# Allegro board pc049a_toplevel_12.brd
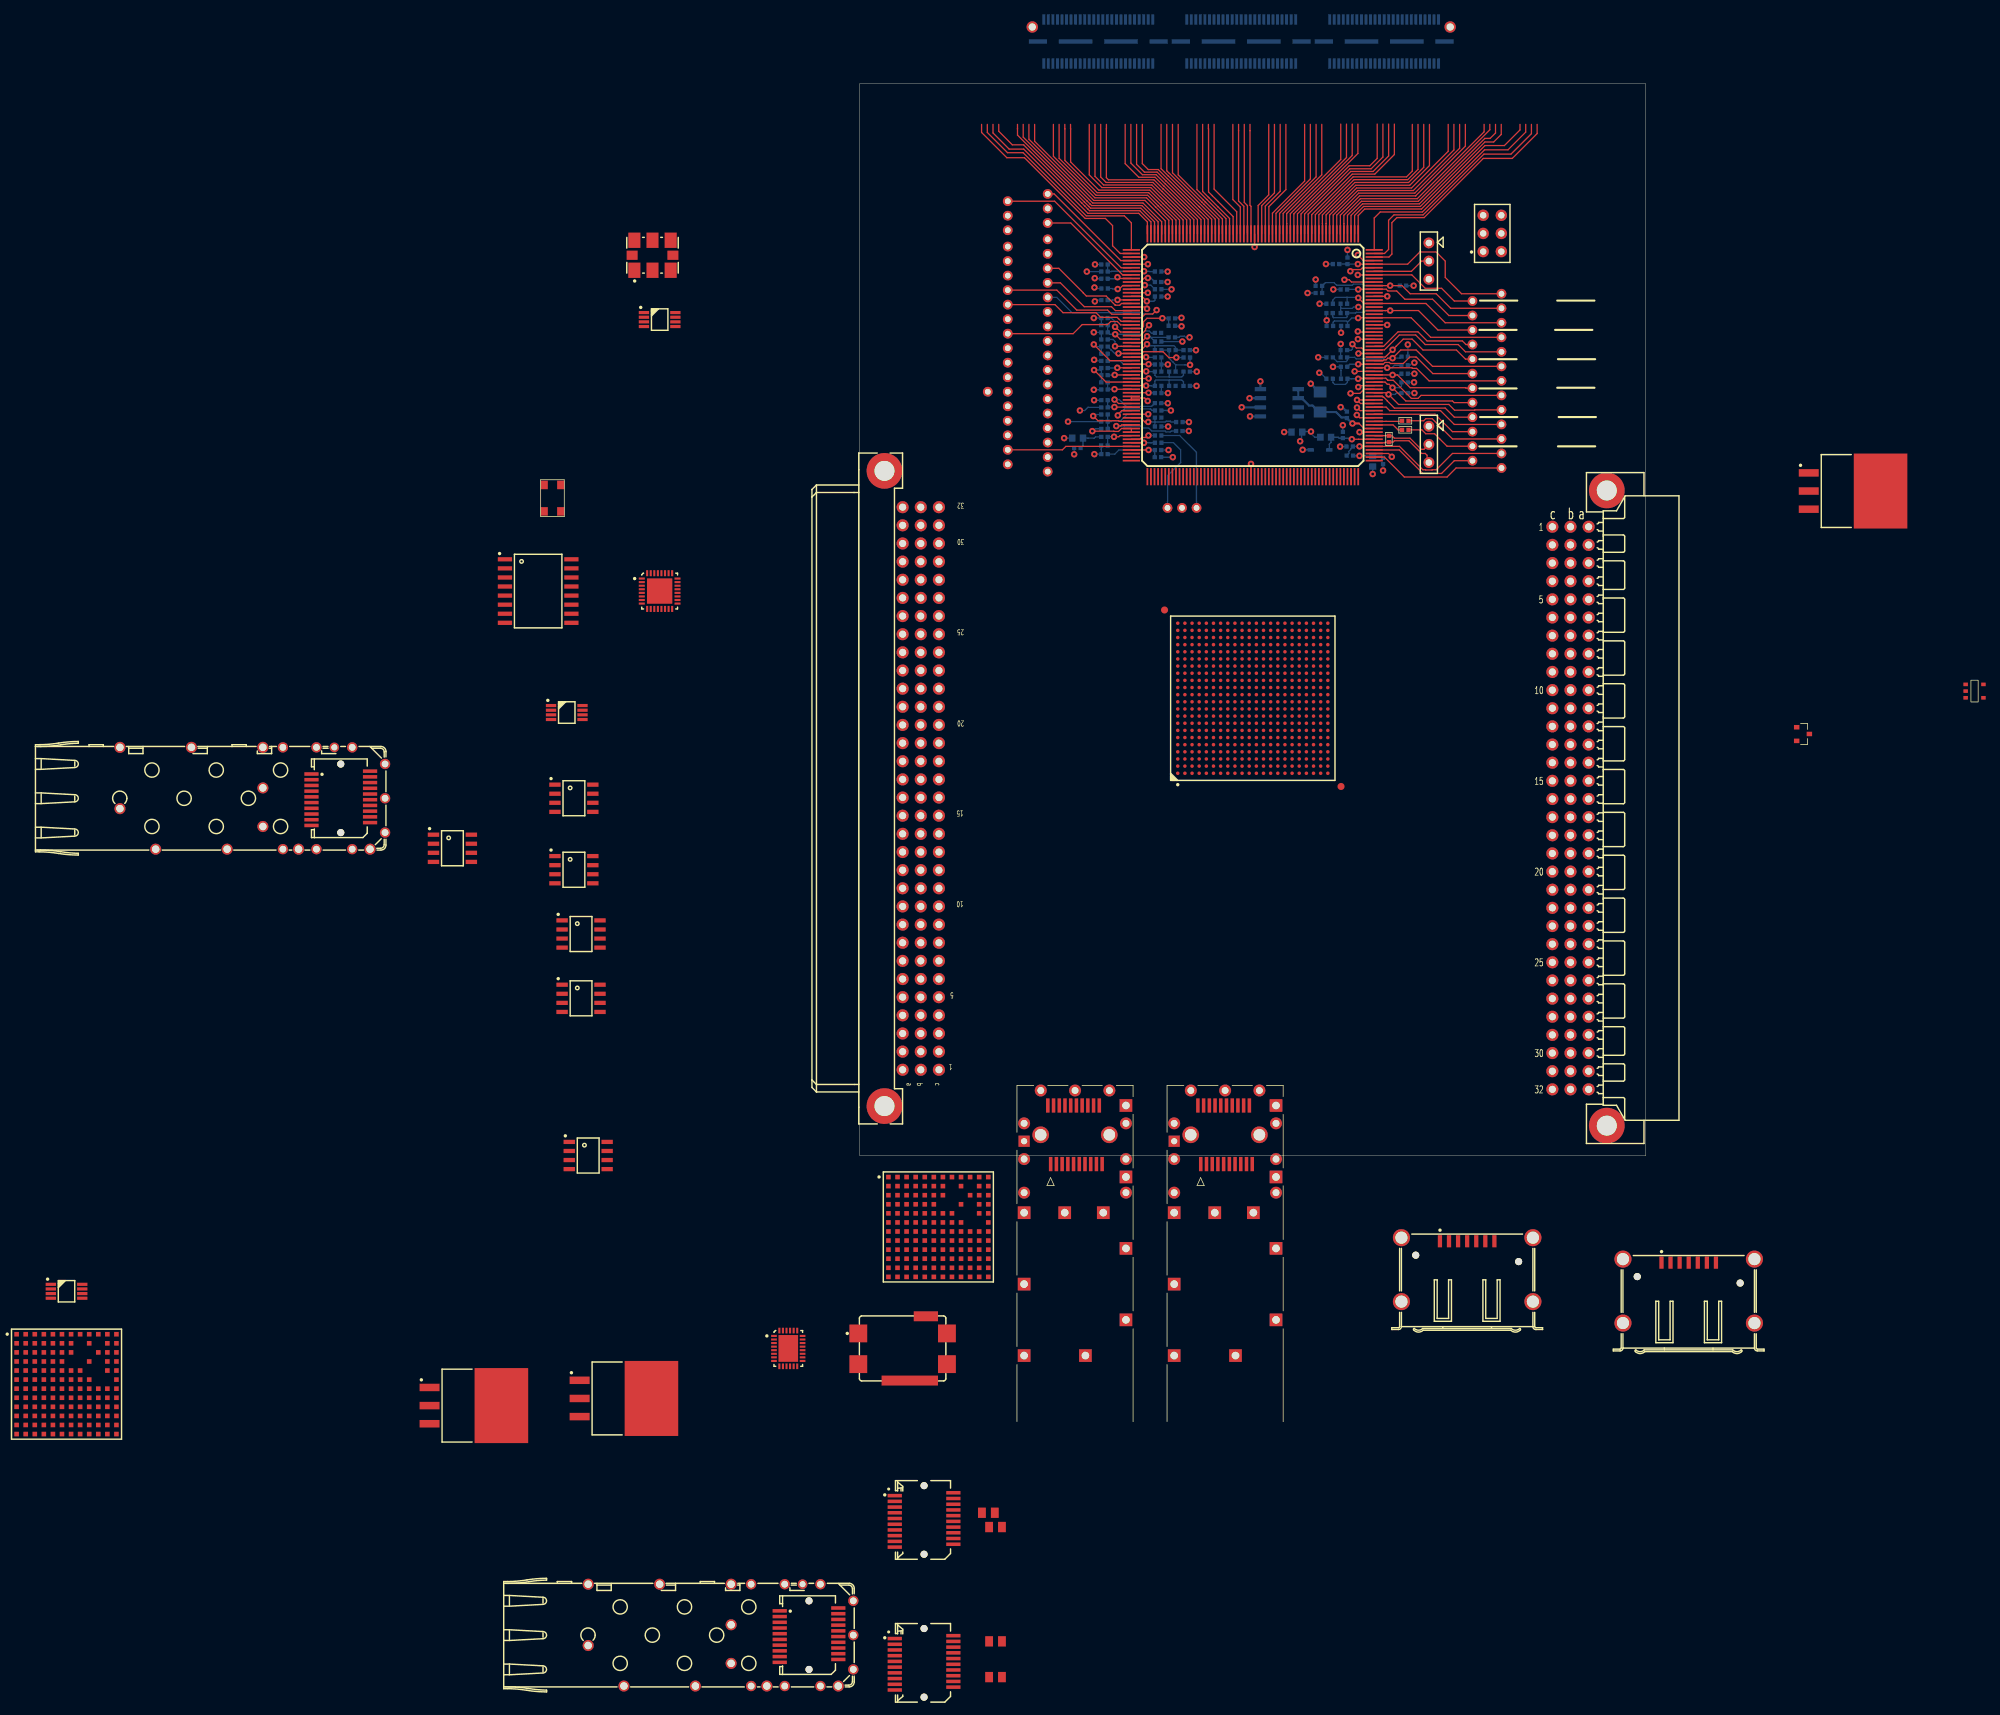
[diagram p0: board, top side]
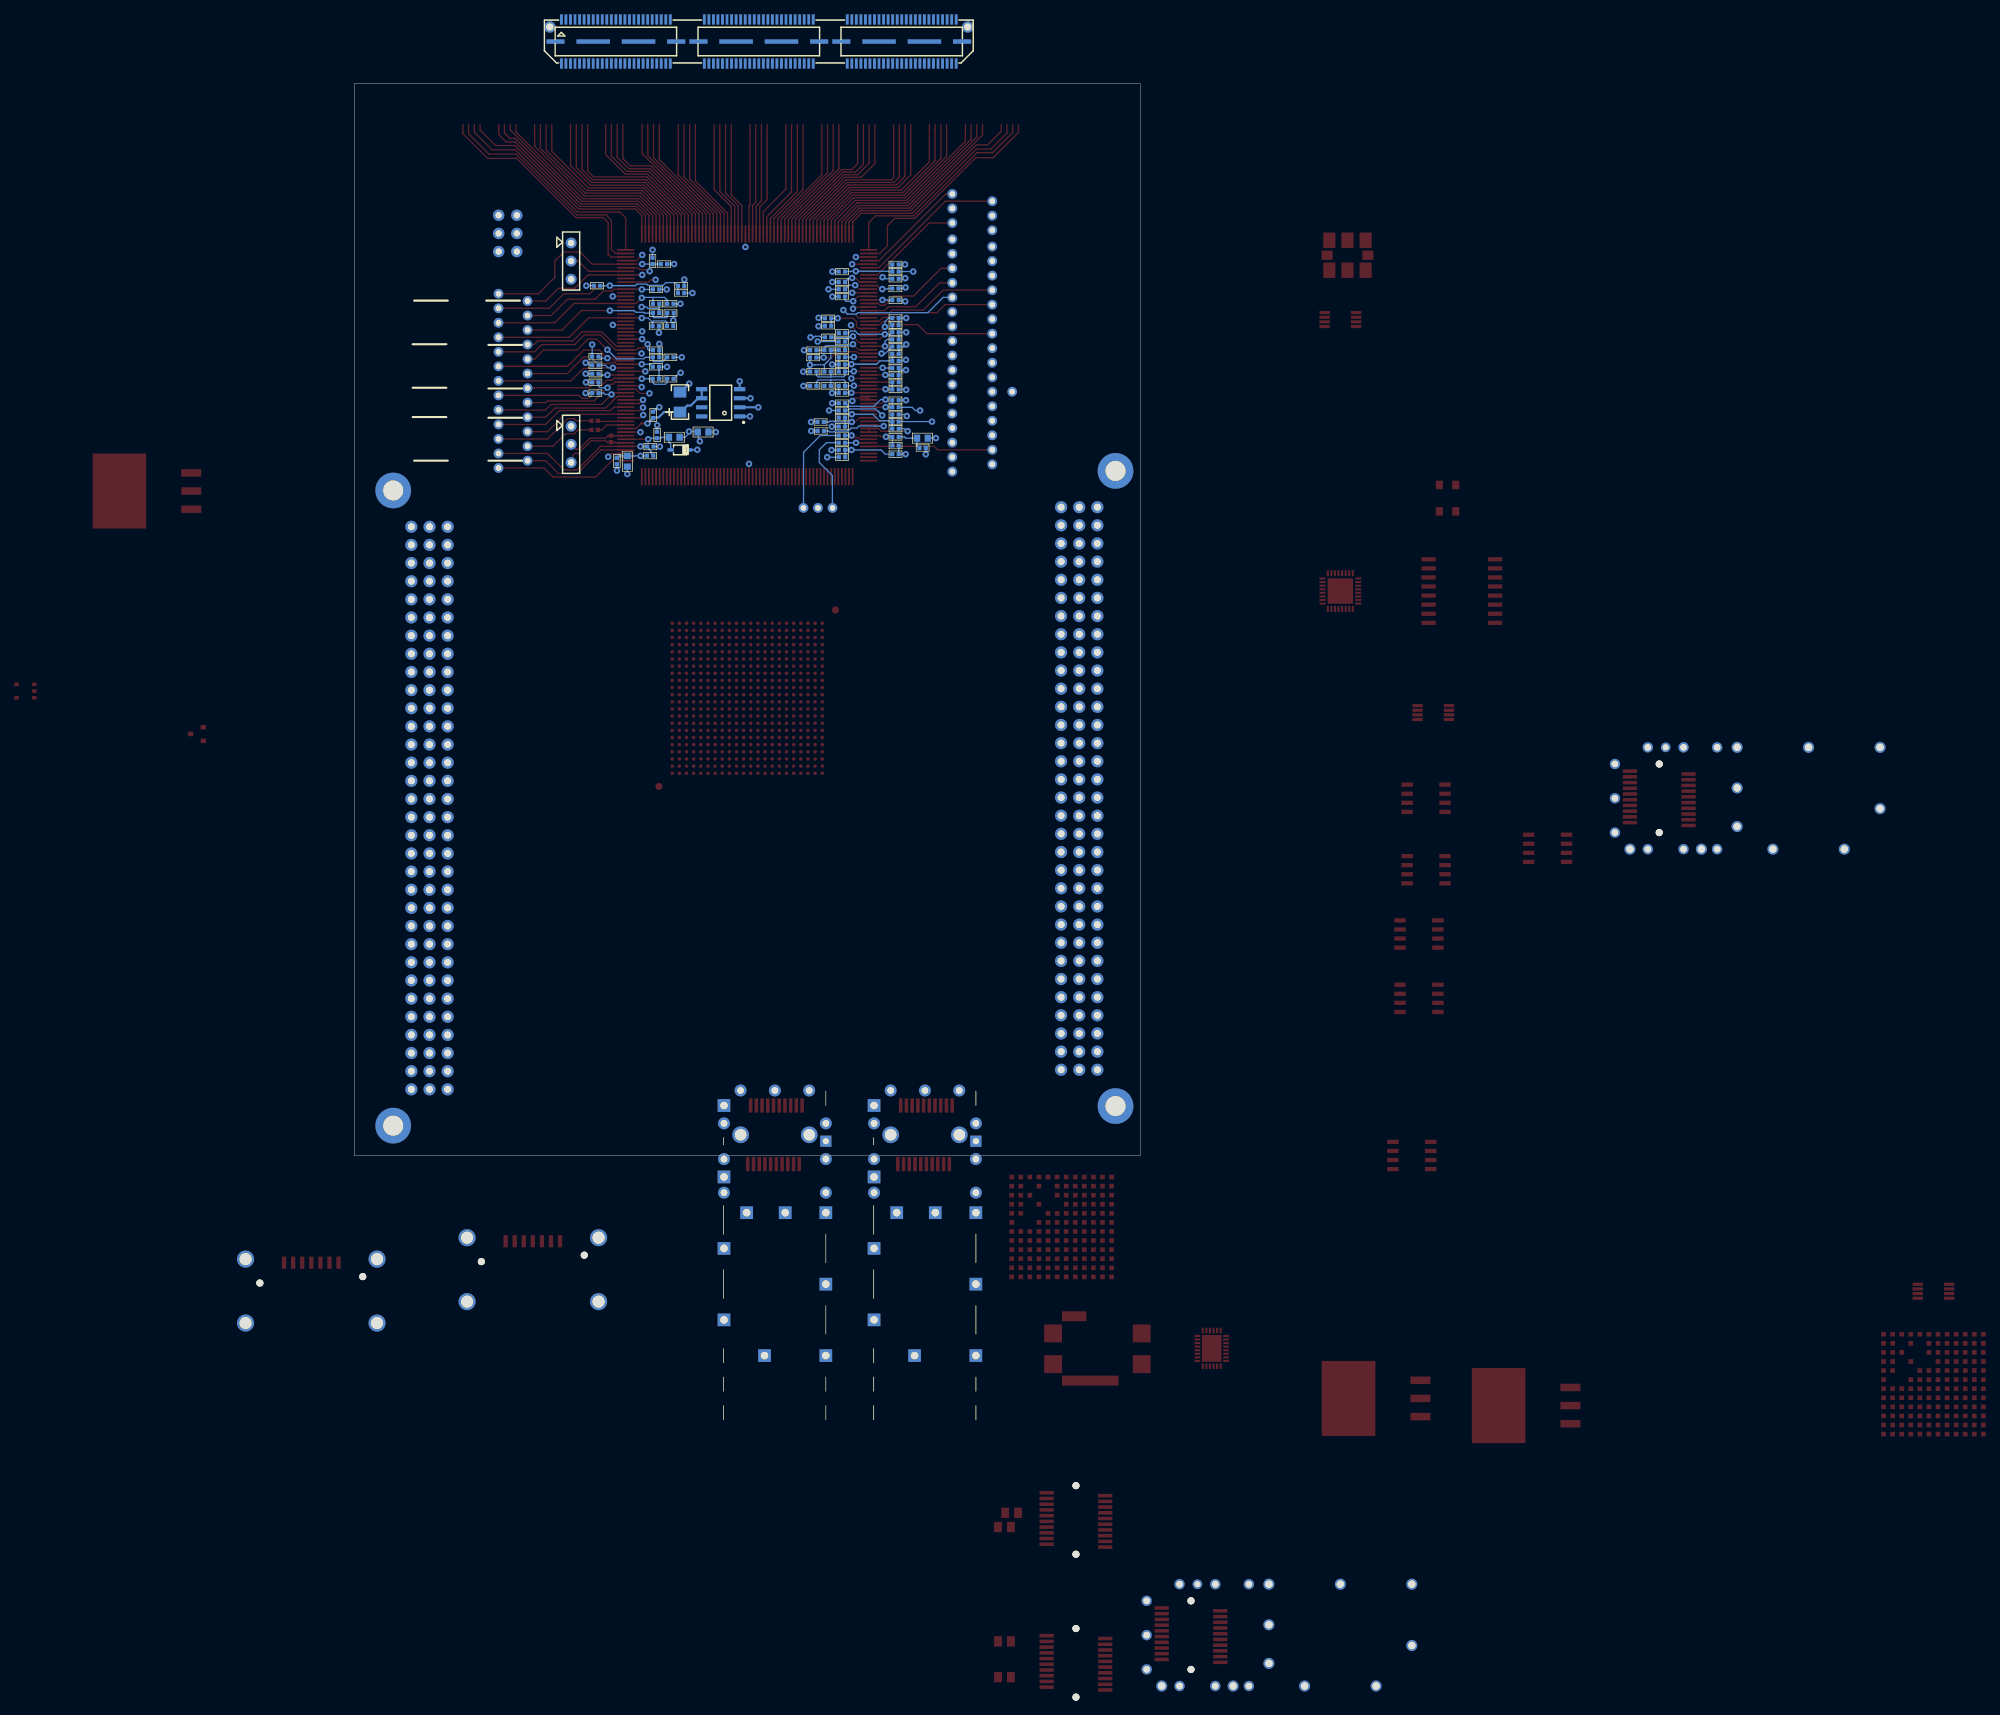
[diagram p1: board, bottom side, seen from below]

Outline 110 x 150 mm; copper layers: TOP, L2, L3, L4, L5, BOTTOM. Coordinates in mm from the lower left corner of the outline.
Outline path: 0,150 110,150 110,0 0,0 0,150

## Design rules (mm)
net group OR: nets OR<0> OR<1>
net group SATA_RXN: nets SATA_MRX_N SATA_SRX_N
net group SATA_RXP: nets SATA_MRX_P SATA_SRX_P
net group SATA_TXN: nets SATA_MTX_N SATA_STX_N
net group SATA_TXP: nets SATA_MTX_P SATA_STX_P
net group SFP_LOS: nets SFP0_LOS SFP1_LOS
net group SFP_MOD_DEF0: nets SFP0_MOD_DEF0 SFP1_MOD_DEF0
net group SFP_MOD_DEF1: nets SFP0_MOD_DEF1 SFP1_MOD_DEF1
net group SFP_MODE_DEF2: nets SFP0_MOD_DEF2 SFP1_MOD_DEF2
net group SFP_RATE_SELECT: nets SFP0_RATE_SELECT SFP1_RATE_SELECT
net group SFP_RXN: nets SFP0_RX_N SFP1_RX_N
net group SFP_RXP: nets SFP0_RX_P SFP1_RX_P
net group SFP_TX_DISABLE: nets SFP0_TX_DISABLE SFP1_TX_DISABLE
net group SFP_TX_FAULT: nets SFP0_TX_FAULT SFP1_TX_FAULT
net group SFP_TXN: nets SFP0_TX_N SFP1_TX_N
net group SFP_TXP: nets SFP0_TX_P SFP1_TX_P
net group ANALOG_TO_MAROC: nets ANALOG_TO_MAROC<0> ANALOG_TO_MAROC<1> ANALOG_TO_MAROC<2> ANALOG_TO_MAROC<3> ANALOG_TO_MAROC<4> ANALOG_TO_MAROC<5> ANALOG_TO_MAROC<6> ANALOG_TO_MAROC<7> ANALOG_TO_MAROC<8> ANALOG_TO_MAROC<9> ANALOG_TO_MAROC<10> ANALOG_TO_MAROC<11> ANALOG_TO_MAROC<12> ANALOG_TO_MAROC<13> ANALOG_TO_MAROC<14> ANALOG_TO_MAROC<15> ANALOG_TO_MAROC<16> ANALOG_TO_MAROC<17> ANALOG_TO_MAROC<18> ANALOG_TO_MAROC<19> ANALOG_TO_MAROC<20> ANALOG_TO_MAROC<21> ANALOG_TO_MAROC<22> ANALOG_TO_MAROC<23> ANALOG_TO_MAROC<24> ANALOG_TO_MAROC<25> ANALOG_TO_MAROC<26> ANALOG_TO_MAROC<27> ANALOG_TO_MAROC<28> ANALOG_TO_MAROC<29> ANALOG_TO_MAROC<30> ANALOG_TO_MAROC<31> ANALOG_TO_MAROC<32> ANALOG_TO_MAROC<33> ANALOG_TO_MAROC<34> ANALOG_TO_MAROC<35> ANALOG_TO_MAROC<36> ANALOG_TO_MAROC<37> ANALOG_TO_MAROC<38> ANALOG_TO_MAROC<39> ANALOG_TO_MAROC<40> ANALOG_TO_MAROC<41> ANALOG_TO_MAROC<42> ANALOG_TO_MAROC<43> ANALOG_TO_MAROC<44> ANALOG_TO_MAROC<45> ANALOG_TO_MAROC<46> ANALOG_TO_MAROC<47> ANALOG_TO_MAROC<48> ANALOG_TO_MAROC<49> ANALOG_TO_MAROC<50> ANALOG_TO_MAROC<51> ANALOG_TO_MAROC<52> ANALOG_TO_MAROC<53> ANALOG_TO_MAROC<54> ANALOG_TO_MAROC<55> ANALOG_TO_MAROC<56> ANALOG_TO_MAROC<57> ANALOG_TO_MAROC<58> ANALOG_TO_MAROC<59> ANALOG_TO_MAROC<60> ANALOG_TO_MAROC<61> ANALOG_TO_MAROC<62> ANALOG_TO_MAROC<63>
net group DIG_CTEST: nets DIG_CTEST<0> DIG_CTEST<1> DIG_CTEST<2> DIG_CTEST<3> DIG_CTEST<4> DIG_CTEST<5>
net group DIP_SWITCH: nets DIP_SWITCH<0> DIP_SWITCH<1> DIP_SWITCH<2> DIP_SWITCH<3>
net group FPGA_GPIO: nets FPGA_GPIO<0> FPGA_GPIO<1> FPGA_GPIO<2> FPGA_GPIO<3> FPGA_GPIO<4> FPGA_GPIO<5> FPGA_GPIO<6> FPGA_GPIO<7>
net group FPGA_LEDS: nets FPGA_LEDS<0> FPGA_LEDS<1> FPGA_LEDS<2> FPGA_LEDS<3> FPGA_LEDS<4>
net group LVDS_DLEFT_N: nets LVDS_DLEFT_N<0> LVDS_DLEFT_N<1> LVDS_DLEFT_N<2> LVDS_DLEFT_N<3> LVDS_DLEFT_N<4> LVDS_DLEFT_N<5> LVDS_DLEFT_N<6> LVDS_DLEFT_N<7> LVDS_DLEFT_N<8> LVDS_DLEFT_N<9> LVDS_DLEFT_N<10> LVDS_DLEFT_N<11> LVDS_DLEFT_N<12> LVDS_DLEFT_N<13> LVDS_DLEFT_N<14> LVDS_DLEFT_N<15>
net group LVDS_DLEFT_P: nets LVDS_DLEFT_P<0> LVDS_DLEFT_P<1> LVDS_DLEFT_P<2> LVDS_DLEFT_P<3> LVDS_DLEFT_P<4> LVDS_DLEFT_P<5> LVDS_DLEFT_P<6> LVDS_DLEFT_P<7> LVDS_DLEFT_P<8> LVDS_DLEFT_P<9> LVDS_DLEFT_P<10> LVDS_DLEFT_P<11> LVDS_DLEFT_P<12> LVDS_DLEFT_P<13> LVDS_DLEFT_P<14> LVDS_DLEFT_P<15>
net group LVDS_DRIGHT_N: nets LVDS_DRIGHT_N<0> LVDS_DRIGHT_N<1> LVDS_DRIGHT_N<2> LVDS_DRIGHT_N<3> LVDS_DRIGHT_N<4> LVDS_DRIGHT_N<5> LVDS_DRIGHT_N<6> LVDS_DRIGHT_N<7> LVDS_DRIGHT_N<8> LVDS_DRIGHT_N<9> LVDS_DRIGHT_N<10> LVDS_DRIGHT_N<11> LVDS_DRIGHT_N<12> LVDS_DRIGHT_N<13> LVDS_DRIGHT_N<14> LVDS_DRIGHT_N<15>
net group LVDS_DRIGHT_P: nets LVDS_DRIGHT_P<0> LVDS_DRIGHT_P<1> LVDS_DRIGHT_P<2> LVDS_DRIGHT_P<3> LVDS_DRIGHT_P<4> LVDS_DRIGHT_P<5> LVDS_DRIGHT_P<6> LVDS_DRIGHT_P<7> LVDS_DRIGHT_P<8> LVDS_DRIGHT_P<9> LVDS_DRIGHT_P<10> LVDS_DRIGHT_P<11> LVDS_DRIGHT_P<12> LVDS_DRIGHT_P<13> LVDS_DRIGHT_P<14> LVDS_DRIGHT_P<15>
net group SUM: nets SUM<1>_1 SUM<2>_1 SUM<3>_1 SUM<4>_1 SUM<5>_1 SUM<6>_1 SUM<7>_1 SUM<8>_1
net group TRIG: nets TRIG<0> TRIG<1> TRIG<2> TRIG<3> TRIG<4> TRIG<5> TRIG<6> TRIG<7> TRIG<8> TRIG<9> TRIG<10> TRIG<11> TRIG<12> TRIG<13> TRIG<14> TRIG<15> TRIG<16> TRIG<17> TRIG<18> TRIG<19> TRIG<20> TRIG<21> TRIG<22> TRIG<23> TRIG<24> TRIG<25> TRIG<26> TRIG<27> TRIG<28> TRIG<29> TRIG<30> TRIG<31> TRIG<32> TRIG<33> TRIG<34> TRIG<35> TRIG<36> TRIG<37> TRIG<38> TRIG<39> TRIG<40> TRIG<41> TRIG<42> TRIG<43> TRIG<44> TRIG<45> TRIG<46> TRIG<47> TRIG<48> TRIG<49> TRIG<50> TRIG<51> TRIG<52> TRIG<53> TRIG<54> TRIG<55> TRIG<56> TRIG<57> TRIG<58> TRIG<59> TRIG<60> TRIG<61> TRIG<62> TRIG<63>
net group UNNAMED_4_CDCM61004_I8_VCCOUT: nets P3V3A
net group UNNAMED_9_CAPCERSMDCL2_I82_B: nets UNNAMED_9_CAPCERSMDCL2_I82_B<0>
net group UNNAMED_9_LTM4606_I4_VOUT: nets P1V5
net group UNNAMED_9_LTM4606_I72_DRVCC: nets UNNAMED_9_LTM4606_I72_DRVCC<0>
net group UNNAMED_9_LTM4606_I72_VOUT: nets P3V8
net group UNNAMED_10_PC049AFPGA_I1_GND: nets GND_SIGNAL
net group UNNAMED_10_PC049AFPGA_I1_VCCAUX: nets P2V5
net group UNNAMED_10_PC049AFPGA_I1_VCCINT: nets P1V2
net group UNNAMED_10_PC049AFPGA_I1_VCCO3: nets P3V3
net group UNNAMED_11_CAPCERSMDCL2_I82_B: nets UNNAMED_11_CAPCERSMDCL2_I82_<0>
net group UNNAMED_11_LTM4606_I72_DRVCC: nets UNNAMED_11_LTM4606_I72_DRVCC<0>
net group UNNAMED_11_LTM4606_I72_PGND: nets DGND
net group UNNAMED_11_LTM4606_I72_VIN: nets P12V
net group UNNAMED_11_LTM4606_I72_VOUT: nets P4V8

## Placement (name value [footprint] x y rotation side)
C1_1  100nF  [C0402]  68.56 99.22 180 bottom
C2_1  100nF  [C0402]  34.24 99.37 0 bottom
C3_1  100nF  [C0402]  43.67 114.51 180 bottom
C4_1  100nF  [C0402]  68.25 125.21 270 bottom
C5_1  100nF  [C0402]  67.75 119.21 0 bottom
C6_1  100nF  [C0402]  34.25 124.71 0 bottom
C7_1  100nF  [C0402]  67.75 117.91 0 bottom
C8_1  100nF  [C0402]  34.25 123.71 0 bottom
C9_1  100nF  [C0402]  43.68 116.13 180 bottom
C10_1  100nF  [C0402]  67.8 116.1 0 bottom
C11_1  100nF  [C0402]  34.25 108.21 0 bottom
C12_1  100nF  [C0402]  67.75 111.71 0 bottom
C13_1  100nF  [C0402]  34.25 113.21 0 bottom
C14_1  100nF  [C0402]  34.25 105.71 0 bottom
C15_1  100nF  [C0402]  34.25 103.71 0 bottom
C16_1  100nF  [C0402]  67.79 108.72 0 bottom
C17_1  100nF  [C0402]  34.25 101.71 0 bottom
C18_1  100nF  [C0402]  34.25 122.71 0 bottom
C19_1  100nF  [C0402]  41.75 107.71 180 bottom
C20_1  100nF  [C0402]  34.25 119.71 0 bottom
C21_1  100nF  [C0402]  41.75 109.71 180 bottom
C22_1  100nF  [C0402]  34.25 114.21 0 bottom
C23_1  100nF  [C0402]  67.77 110.39 0 bottom
C24_1  100nF  [C0402]  34.25 116.21 0 bottom
C25_1  100nF  [C0402]  76.25 106.71 180 bottom
C26_1  100nF  [C0402]  34.25 109.21 0 bottom
C27_1  100nF  [C0402]  41.75 111.71 180 bottom
C28_1  100nF  [C0402]  41.75 120.21 180 bottom
C29_1  100nF  [C0402]  41.75 112.71 0 bottom
C30_1  100nF  [C0402]  41.75 104.27 180 bottom
C31_1  100nF  [C0402]  76.25 111.81 180 bottom
C32_1  100nF  [C0402]  41.75 122.26 180 bottom
C33_1  100nF  [C0402]  41.75 110.71 180 bottom
C34_1  100nF  [C0402]  44.73 102.65 180 bottom
C35_1  100nF  [C0402]  67.75 112.71 0 bottom
C36_1  100nF  [C0402]  41.76 121.23 180 bottom
C37_1  100nF  [C0402]  76.25 108.21 180 bottom
C38_1  100nF  [C0402]  76.02 121.74 180 bottom
C39_1  100nF  [C0402]  34.26 121.34 0 bottom
C40_1  100nF  [C0402]  34.25 117.21 0 bottom
C41_1  100nF  [C0402]  41.75 106.71 180 bottom
C42_1  100nF  [C0402]  76.24 110.6 180 bottom
C43_1  100nF  [C0402]  67.75 121.21 0 bottom
C44_1  100nF  [C0402]  41.74 98.74 180 bottom
C45_1  100nF  [C0402]  41.74 105.29 180 bottom
C46_1  100nF  [C0402]  76.24 109.42 180 bottom
C47_1  100nF  [C0402]  34.25 110.21 0 bottom
C48_1  22uF  [C3216POL]  64.41 104.05 90 bottom
C50_1  100nF  [C0402]  67.61 100.84 270 bottom
C51_1  100nF  [C0402]  68.17 103.66 270 bottom
C52_1  10uF  [C0603]  71.78 97.17 90 bottom
C53_1  10uF  [C0603]  30.49 100.4 0 bottom
C54_1  10uF  [C0603]  61.17 101.25 0 bottom
D1_1  -  [SOD323_INV]  64.41 98.75 180 bottom
IC1  -  [SOP65P490X95-8N]  -28 117 0 top
IC2  -  [SOIC127P600X175-8N]  -39 31 0 top
IC3  -  [SOIC127P600X175-8N]  -39 22 0 top
IC4  -  [LGA133S127P12X12_05-08-1766]  11 -10 0 top
IC5  -  [SOIC127P600X175-8N]  -40 40 0 top
IC6  -  [SOIC127P600X175-8N]  -40 50 0 top
IC7  -  [SOIC127P600X175-8N]  -38 0 0 top
IC8  -  [SOIC127P600X175-8N]  -57 43 0 top
IC9  -  [SOP65P490X95-8N]  -41 62 0 top
IC10  -  [LGA133S127P12X12_05-08-1766]  -111 -32 0 top
IC11  -  [QFN50P500X500X100-33N-S355]  -28 79 0 top
IC12  -  [SOIC127P1032X265-16N]  -45 79 0 top
IC13  -  [SOP65P490X110-8N]  -111 -19 0 top
J1  -  [CON150_QTSDA]  81 159 90 bottom
J1_1  -  [SAMTEC_SSW-103-01-G-D]  88.51 129.05 270 top
J2  -  [HARTING_0903196X921]  102 88 0 top
J3  -  [HARTING_09732966801]  6 12 180 top
J3_1  -  [CONHE13D3X1M]  79.64 102.07 270 top
J4  -  [MOLEX_47082-001]  85 -12 0 top
J4_1  -  [CONHE13D3X1M]  79.64 127.72 270 top
J5  -  [MOLEX_47082-001]  116 -15 0 top
J6  -  [TYCO_1367073]  9 -51 0 top
J7  -  [TYCO_1367073]  9 -71 0 top
L1  -  [INDC2012X90N]  19 -52 0 top
L2  -  [INDC2012X90N]  18 -50 0 top
L3  -  [INDC2012X90N]  19 -68 0 top
L4  -  [INDC2012X90N]  19 -73 0 top
LC2  -  [MURATA_BNX02]  6 -27 0 top
LK1_1  -  [1-HOLE_0-8P]  89.8 98.26 0 top
LK2_1  -  [1-HOLE_0-8P]  26.3 99.78 0 top
LK3_1  -  [1-HOLE_0-8P]  20.71 123.15 0 top
LK4_1  -  [1-HOLE_0-8P]  89.8 120.61 0 top
LK5_1  -  [1-HOLE_0-8P]  89.8 116.55 0 top
LK6_1  -  [1-HOLE_0-8P]  85.74 119.6 0 top
LK7_1  -  [1-HOLE_0-8P]  85.74 115.53 0 top
LK8_1  -  [1-HOLE_0-8P]  20.71 125.18 0 top
LK9_1  -  [1-HOLE_0-8P]  89.8 114.52 0 top
LK10_1  -  [1-HOLE_0-8P]  85.74 111.47 0 top
LK11_1  -  [1-HOLE_0-8P]  20.71 112.99 0 top
LK12_1  -  [1-HOLE_0-8P]  26.3 105.88 0 top
LK13_1  -  [1-HOLE_0-8P]  89.8 106.39 0 top
LK14_1  -  [1-HOLE_0-8P]  20.71 102.83 0 top
LK15_1  -  [1-HOLE_0-8P]  26.3 97.75 0 top
LK16_1  -  [1-HOLE_0-8P]  26.3 128.23 0 top
LK17_1  -  [1-HOLE_0-8P]  20.71 104.86 0 top
LK18_1  -  [1-HOLE_0-8P]  26.3 126.2 0 top
LK19_1  -  [1-HOLE_0-8P]  26.3 107.91 0 top
LK20_1  -  [1-HOLE_0-8P]  26.3 114.01 0 top
LK21_1  -  [1-HOLE_0-8P]  85.74 109.44 0 top
LK22_1  -  [1-HOLE_0-8P]  20.71 117.06 0 top
LK23_1  -  [1-HOLE_0-8P]  89.8 104.36 0 top
LK24_1  -  [1-HOLE_0-8P]  20.71 108.93 0 top
LK25_1  -  [1-HOLE_0-8P]  26.3 111.98 0 top
LK26_1  -  [1-HOLE_0-8P]  89.8 96.23 0 top
LK27_1  -  [1-HOLE_0-8P]  20.71 106.9 0 top
LK28_1  -  [1-HOLE_0-8P]  89.8 102.32 0 top
LK29_1  -  [1-HOLE_0-8P]  85.74 101.31 0 top
LK30_1  -  [1-HOLE_0-8P]  17.92 106.9 0 top
LK31_1  -  [1-HOLE_0-8P]  20.71 129.5 0 top
LK32_1  -  [1-HOLE_0-8P]  26.3 116.04 0 top
LK33_1  -  [1-HOLE_0-8P]  26.3 101.82 0 top
LK34_1  -  [1-HOLE_0-8P]  89.8 110.45 0 top
LK35_1  -  [1-HOLE_0-8P]  26.3 132.55 0 top
LK36_1  -  [1-HOLE_0-8P]  20.71 110.96 0 top
LK37_1  -  [1-HOLE_0-8P]  20.71 96.74 0 top
LK38_1  -  [1-HOLE_0-8P]  89.8 112.48 0 top
LK39_1  -  [1-HOLE_0-8P]  20.71 131.53 0 top
LK40_1  -  [1-HOLE_0-8P]  85.74 105.37 0 top
LK41_1  -  [1-HOLE_0-8P]  89.8 118.58 0 top
LK42_1  -  [1-HOLE_0-8P]  20.71 127.22 0 top
LK43_1  -  [1-HOLE_0-8P]  26.3 118.07 0 top
LK44_1  -  [1-HOLE_0-8P]  20.71 100.8 0 top
LK45_1  -  [1-HOLE_0-8P]  89.8 108.42 0 top
LK46_1  -  [1-HOLE_0-8P]  85.74 117.56 0 top
LK47_1  -  [1-HOLE_0-8P]  26.3 95.72 0 top
LK48_1  -  [1-HOLE_0-8P]  26.3 103.85 0 top
LK49_1  -  [1-HOLE_0-8P]  85.74 107.4 0 top
LK50_1  -  [1-HOLE_0-8P]  26.3 109.94 0 top
LK51_1  -  [1-HOLE_0-8P]  85.74 99.28 0 top
LK52_1  -  [1-HOLE_0-8P]  89.8 100.29 0 top
LK53_1  -  [1-HOLE_0-8P]  26.3 120.1 0 top
LK54_1  -  [1-HOLE_0-8P]  43.07 90.64 0 top
LK55_1  -  [1-HOLE_0-8P]  45.1 90.64 0 top
LK56_1  -  [1-HOLE_0-8P]  47.13 90.64 0 top
LK57_1  -  [1-HOLE_0-8P]  26.3 130.52 0 top
LK58_1  -  [1-HOLE_0-8P]  85.74 113.5 0 top
LK59_1  -  [1-HOLE_0-8P]  20.71 98.77 0 top
LK60_1  -  [1-HOLE_0-8P]  26.3 134.58 0 top
LK61_1  -  [1-HOLE_0-8P]  26.3 124.17 0 top
LK62_1  -  [1-HOLE_0-8P]  20.71 121.12 0 top
LK63_1  -  [1-HOLE_0-8P]  85.74 103.34 0 top
LK64_1  -  [1-HOLE_0-8P]  26.3 122.14 0 top
LK65_1  -  [1-HOLE_0-8P]  20.71 119.09 0 top
LK66_1  -  [1-HOLE_0-8P]  20.71 133.57 0 top
LK67_1  -  [1-HOLE_0-8P]  20.71 115.02 0 top
LK68_1  -  [1-HOLE_0-8P]  85.74 97.24 0 top
QZ1  -  [OSC_SILABS_SI570]  -29 126 0 top
R1_1  51  [C0402]  76.34 101.56 0 top
R2_1  51  [C0402]  76.34 102.83 0 top
R3_1  10  [C0402]  68.59 97.95 180 bottom
R4_1  10  [C0402]  34.25 100.58 0 bottom
R5_1  10  [C0402]  41.75 113.92 0 bottom
R6_1  10  [C0402]  66.65 124.77 180 bottom
R7_1  10  [C0402]  65.75 119.21 180 bottom
R8_1  10  [C0402]  41.75 123.71 0 bottom
R9_1  10  [C0402]  65.74 117.91 180 bottom
R10_1  10  [C0402]  43.68 117.17 0 bottom
R11_1  10  [C0402]  65.79 116.1 180 bottom
R12_1  10  [C0402]  34.25 107.21 180 bottom
R13_1  10  [C0402]  65.75 111.71 180 bottom
R14_1  100  [C0402]  45.77 111.68 0 bottom
R15_1  10  [C0402]  34.25 104.71 180 bottom
R16_1  10  [C0402]  34.25 102.71 180 bottom
R17_1  100  [C0402]  65.75 108.71 180 bottom
R18_1  51  [C0402]  41.75 99.76 180 bottom
R19_1  51  [C0402]  41.75 100.77 180 bottom
R20_1  XX  [C0402]  43.75 107.71 0 bottom
R21_1  XX  [C0402]  45.75 107.71 180 bottom
R22_1  XX  [C0402]  43.75 109.71 0 bottom
R23_1  XX  [C0402]  45.75 109.71 180 bottom
R24_1  100  [C0402]  74.05 100.29 270 top
R25_1  XX  [C0402]  41.74 115.13 0 bottom
R26_1  XX  [C0402]  34.25 115.21 0 bottom
R27_1  1k  [C0402]  44.71 101.4 0 bottom
R28_1  XX  [C0402]  43.75 112.71 180 bottom
R29_1  XX  [C0402]  45.75 112.71 180 bottom
R30_1  XX  [C0402]  34.25 111.21 180 bottom
R31_1  XX  [C0402]  34.25 112.21 0 bottom
R32_1  XX  [C0402]  41.75 103.27 0 bottom
R33_1  XX  [C0402]  41.75 102.02 180 bottom
R34_1  XX  [C0402]  64.25 121.71 180 bottom
R35_1  XX  [C0402]  64.25 120.71 0 bottom
R36_1  XX  [C0402]  41.73 97.73 0 bottom
R37_1  XX  [C0402]  34.25 98.16 0 bottom
R42_1  82  [C0603]  65.21 100.52 180 bottom
R46_1  3.3  [C0402]  73.23 97.2 90 bottom
R47_1  3.3  [C0402]  30.46 99.02 0 bottom
RD  -  [unnamed]  -8 -60 0 top
RD#2  -  [unnamed#3]  -85 50 0 top
REG1  -  [TO254P1435X460-4N]  -33 -34 0 top
REG2  -  [TO254P1435X460-4N]  139 93 0 top
REG3  -  [TO254P1435X460-4N]  -54 -35 0 top
RG1  -  [QFN50P400X500X80-29N-R375X275]  -10 -27 0 top
RG1_1  2.5V  [SOIC127P600X175-8N]  58.71 105.35 0 bottom
U1  -  [OSC_4PIN_53S]  -43 92 0 top
U1_1  -  [PQFP240_050]  69.75 128.99 270 top
U2  -  [SOT23-5]  156 65 0 top
U3  -  [BGA484C100P22X22_2300X2300X260]  55 64 90 top
UNK*  -  [unnamed#2]  44 2 90 top
UXXX  -  [unnamed#2]  23 2 90 top
Z1  -  [SOT23]  132 59 0 top

## Library data of the parts
C1_1 C2_1 C3_1 C4_1 C5_1 C6_1 C7_1 C8_1 C9_1 C10_1 C11_1 C12_1 C13_1 C14_1 C15_1 C16_1 C17_1 C18_1 C19_1 C20_1 C21_1 C22_1 C23_1 C24_1 C25_1 C26_1 C27_1 C28_1 C29_1 C30_1 C31_1 C32_1 C33_1 C34_1 C35_1 C36_1 C37_1 C38_1 C39_1 C40_1 C41_1 C42_1 C43_1 C44_1 C45_1 C46_1 C47_1 C50_1 C51_1 = CAPCERSMDCL2: part number: CAPCERSMDCL2_0402-100NF,16V_GEN; tolerance: 10%
C48_1 = ELCAPTAN: part number: ELCAPTAN_SMD_A-22UF,6.3V
C52_1 C53_1 C54_1 = CAPCERSMDCL2: part number: CAPCERSMDCL2_0603-10UF_X5R,6.3V; tolerance: 5%
D1_1 = DIODE_CA: part number: DIODE_CA_SCHOTTKY-RB751V40T1
IC1 IC9 = AD5662: part number: AD5662BRMZ-1
IC2 IC3 = DS92001: part number: DS92001TMA
IC4 IC10 = LTM4606: part number: LTM4606EV#PBF
IC5-IC7 = DS90LV001: part number: DS90LV001TM
IC8 = 100EP05: part number: MC100EP05DG
IC11 = CDCM61004: part number: CDCM61004RHB
IC12 = M25P32: part number: M25P32-VMF6P
IC13 = DS18B20: part number: DS18B20U+
J1 = CON150P: part number: CON150P-QTS75_03FDA
J1_1 = CON6P: part number: CON6P-SSW-103-01-G-D
J2 = CONABC96: part number: CONABC96-09 03 196 6921
J3 = CONABC96: part number: CONABC96-09 73 296 6801
J3_1 J4_1 = CON3P: part number: CON3P-SIL254D
J4 J5 = CON7P: part number: CON7P-47082-1000
J6 J7 = CON20P_SFP: part number: CON20P_SFP-1367073-1
L1-L4 = FERRITE: part number: FERRITE_C0805-LI0805H121R-10,LI0805H121R-10
LC2 = BNX02: part number: BNX022-01
LK1_1 LK2_1 LK3_1 LK4_1 LK5_1 LK6_1 LK7_1 LK8_1 LK9_1 LK10_1 LK11_1 LK12_1 LK13_1 LK14_1 LK15_1 LK16_1 LK17_1 LK18_1 LK19_1 LK20_1 LK21_1 LK22_1 LK23_1 LK24_1 LK25_1 LK26_1 LK27_1 LK28_1 LK29_1 LK30_1 LK31_1 LK32_1 LK33_1 LK34_1 LK35_1 LK36_1 LK37_1 LK38_1 LK39_1 LK40_1 LK41_1 LK42_1 LK43_1 LK44_1 LK45_1 LK46_1 LK47_1 LK48_1 LK49_1 LK50_1 LK51_1 LK52_1 LK53_1 LK54_1 LK55_1 LK56_1 LK57_1 LK58_1 LK59_1 LK60_1 LK61_1 LK62_1 LK63_1 LK64_1 LK65_1 LK66_1 LK67_1 LK68_1 = 1-HOLE: part number: 1-HOLE_0-8-BASE
QZ1 = OSC_8P_OE_CLKP_CLKN_SDA_SCL: part number: 570CAC000121DG
R1_1 R2_1 R18_1 R19_1 = RSMD0402: part number: RSMD0402_1/16W-51,1%; tolerance: 1%
R3_1 R4_1 R5_1 R6_1 R7_1 R8_1 R9_1 R10_1 R11_1 R12_1 R13_1 R15_1 R16_1 = RSMD0402: part number: RSMD0402_1/16W-10R,5%; tolerance: 5%
R14_1 R17_1 = RSMD0402: part number: RSMD0402_1/16W-100,0.1%_GEN; tolerance: 0.1%
R20_1 R21_1 R22_1 R23_1 R25_1 R26_1 R28_1 R29_1 R30_1 R31_1 R32_1 R33_1 R34_1 R35_1 R36_1 R37_1 = RSMD0402: part number: RSMD0402_0.0625W-XX,1%; tolerance: 1%
R24_1 = RSMD0402: part number: RSMD0402_1/16W-100,1%; tolerance: 1%
R27_1 = RSMD0402: part number: RSMD0402_1/16W-1K,5%; tolerance: 5%
R42_1 = RSMD0603: part number: RSMD0603_1/10W-82,1%; tolerance: 1%
R46_1 R47_1 = RSMD0402: part number: RSMD0402_1/16W-3.3R,5%; tolerance: 5%
REG1 = LM1084: part number: LM1084IS-3.3
REG2 REG3 = LM1084: part number: LM1084IS-ADJ
RG1 = LT3070: part number: LT3070EUFD#PBF
RG1_1 = TPS776XX: part number: TPS77625D
U1 = OSC_VCXO_4P: part number: OSC_VCXO_4P_OSC_4PIN_53S-25MHZ,MERCURY
U1_1 = MAROC3: part number: MAROC3_PQFP-IN2P3
U2 = AD8031: part number: AD8031_SOT23-5-AD
U3 = PC049A_FPGA
Z1 = LM4040: part number: LM4040-CIM3-2.5V,0.5%

## Footprints (pads in the part's own frame, mm; a bottom-side part is the same pattern mirrored in y, then rotated)
1-HOLE_0-8P
  round 1.372 hole 0.813: 1(0,0)
BGA484C100P22X22_2300X2300X260
  round 1 smd: (-12.35,-12.35) (12.35,12.35)
  round 0.5 smd: A1(-10.5,10.5) A2(-9.5,10.5) A3(-8.5,10.5) A4(-7.5,10.5) A5(-6.5,10.5) A6(-5.5,10.5) A7(-4.5,10.5) A8(-3.5,10.5) A9(-2.5,10.5) A10(-1.5,10.5) A11(-0.5,10.5) A12(0.5,10.5) A13(1.5,10.5) A14(2.5,10.5) A15(3.5,10.5) A16(4.5,10.5) A17(5.5,10.5) A18(6.5,10.5) A19(7.5,10.5) A20(8.5,10.5) A21(9.5,10.5) A22(10.5,10.5) AA1(-10.5,-9.5) AA2(-9.5,-9.5) AA3(-8.5,-9.5) AA4(-7.5,-9.5) AA5(-6.5,-9.5) AA6(-5.5,-9.5) AA7(-4.5,-9.5) AA8(-3.5,-9.5) AA9(-2.5,-9.5) AA10(-1.5,-9.5) AA11(-0.5,-9.5) AA12(0.5,-9.5) AA13(1.5,-9.5) AA14(2.5,-9.5) AA15(3.5,-9.5) AA16(4.5,-9.5) AA17(5.5,-9.5) AA18(6.5,-9.5) AA19(7.5,-9.5) AA20(8.5,-9.5) AA21(9.5,-9.5) AA22(10.5,-9.5) AB1(-10.5,-10.5) AB2(-9.5,-10.5) AB3(-8.5,-10.5) AB4(-7.5,-10.5) AB5(-6.5,-10.5) AB6(-5.5,-10.5) AB7(-4.5,-10.5) AB8(-3.5,-10.5) AB9(-2.5,-10.5) AB10(-1.5,-10.5) AB11(-0.5,-10.5) AB12(0.5,-10.5) AB13(1.5,-10.5) AB14(2.5,-10.5) AB15(3.5,-10.5) AB16(4.5,-10.5) AB17(5.5,-10.5) AB18(6.5,-10.5) AB19(7.5,-10.5) AB20(8.5,-10.5) AB21(9.5,-10.5) AB22(10.5,-10.5) B1(-10.5,9.5) B2(-9.5,9.5) B3(-8.5,9.5) B4(-7.5,9.5) B5(-6.5,9.5) B6(-5.5,9.5) B7(-4.5,9.5) B8(-3.5,9.5) B9(-2.5,9.5) B10(-1.5,9.5) B11(-0.5,9.5) B12(0.5,9.5) B13(1.5,9.5) B14(2.5,9.5) B15(3.5,9.5) B16(4.5,9.5) B17(5.5,9.5) B18(6.5,9.5) B19(7.5,9.5) B20(8.5,9.5) B21(9.5,9.5) B22(10.5,9.5) C1(-10.5,8.5) C2(-9.5,8.5) C3(-8.5,8.5) C4(-7.5,8.5) C5(-6.5,8.5) C6(-5.5,8.5) C7(-4.5,8.5) C8(-3.5,8.5) C9(-2.5,8.5) C10(-1.5,8.5) C11(-0.5,8.5) C12(0.5,8.5) C13(1.5,8.5) C14(2.5,8.5) C15(3.5,8.5) C16(4.5,8.5) C17(5.5,8.5) C18(6.5,8.5) C19(7.5,8.5) C20(8.5,8.5) C21(9.5,8.5) C22(10.5,8.5) D1(-10.5,7.5) D2(-9.5,7.5) D3(-8.5,7.5) D4(-7.5,7.5) D5(-6.5,7.5) D6(-5.5,7.5) D7(-4.5,7.5) D8(-3.5,7.5) D9(-2.5,7.5) D10(-1.5,7.5) D11(-0.5,7.5) D12(0.5,7.5) D13(1.5,7.5) D14(2.5,7.5) D15(3.5,7.5) D16(4.5,7.5) D17(5.5,7.5) D18(6.5,7.5) D19(7.5,7.5) D20(8.5,7.5) D21(9.5,7.5) D22(10.5,7.5) E1(-10.5,6.5) E2(-9.5,6.5) E3(-8.5,6.5) E4(-7.5,6.5) E5(-6.5,6.5) E6(-5.5,6.5) E7(-4.5,6.5) E8(-3.5,6.5) E9(-2.5,6.5) E10(-1.5,6.5) E11(-0.5,6.5) E12(0.5,6.5) E13(1.5,6.5) E14(2.5,6.5) E15(3.5,6.5) E16(4.5,6.5) E17(5.5,6.5) E18(6.5,6.5) E19(7.5,6.5) E20(8.5,6.5) E21(9.5,6.5) E22(10.5,6.5) F1(-10.5,5.5) F2(-9.5,5.5) F3(-8.5,5.5) F4(-7.5,5.5) F5(-6.5,5.5) F6(-5.5,5.5) F7(-4.5,5.5) F8(-3.5,5.5) F9(-2.5,5.5) F10(-1.5,5.5) F11(-0.5,5.5) F12(0.5,5.5) F13(1.5,5.5) F14(2.5,5.5) F15(3.5,5.5) F16(4.5,5.5) F17(5.5,5.5) F18(6.5,5.5) F19(7.5,5.5) F20(8.5,5.5) F21(9.5,5.5) F22(10.5,5.5) G1(-10.5,4.5) G2(-9.5,4.5) G3(-8.5,4.5) G4(-7.5,4.5) G5(-6.5,4.5) G6(-5.5,4.5) G7(-4.5,4.5) G8(-3.5,4.5) G9(-2.5,4.5) G10(-1.5,4.5) G11(-0.5,4.5) G12(0.5,4.5) G13(1.5,4.5) G14(2.5,4.5) G15(3.5,4.5) G16(4.5,4.5) G17(5.5,4.5) G18(6.5,4.5) G19(7.5,4.5) G20(8.5,4.5) G21(9.5,4.5) G22(10.5,4.5) H1(-10.5,3.5) H2(-9.5,3.5) H3(-8.5,3.5) H4(-7.5,3.5) H5(-6.5,3.5) H6(-5.5,3.5) H7(-4.5,3.5) H8(-3.5,3.5) H9(-2.5,3.5) H10(-1.5,3.5) H11(-0.5,3.5) H12(0.5,3.5) H13(1.5,3.5) H14(2.5,3.5) H15(3.5,3.5) H16(4.5,3.5) H17(5.5,3.5) H18(6.5,3.5) H19(7.5,3.5) H20(8.5,3.5) H21(9.5,3.5) H22(10.5,3.5) J1(-10.5,2.5) J2(-9.5,2.5) J3(-8.5,2.5) J4(-7.5,2.5) J5(-6.5,2.5) J6(-5.5,2.5) J7(-4.5,2.5) J8(-3.5,2.5) J9(-2.5,2.5) J10(-1.5,2.5) J11(-0.5,2.5) J12(0.5,2.5) J13(1.5,2.5) J14(2.5,2.5) J15(3.5,2.5) J16(4.5,2.5) J17(5.5,2.5) J18(6.5,2.5) J19(7.5,2.5) J20(8.5,2.5) J21(9.5,2.5) J22(10.5,2.5) K1(-10.5,1.5) K2(-9.5,1.5) K3(-8.5,1.5) K4(-7.5,1.5) K5(-6.5,1.5) K6(-5.5,1.5) K7(-4.5,1.5) K8(-3.5,1.5) K9(-2.5,1.5) K10(-1.5,1.5) K11(-0.5,1.5) K12(0.5,1.5) K13(1.5,1.5) K14(2.5,1.5) K15(3.5,1.5) K16(4.5,1.5) K17(5.5,1.5) K18(6.5,1.5) K19(7.5,1.5) K20(8.5,1.5) K21(9.5,1.5) K22(10.5,1.5) L1(-10.5,0.5) L2(-9.5,0.5) L3(-8.5,0.5) L4(-7.5,0.5) L5(-6.5,0.5) L6(-5.5,0.5) L7(-4.5,0.5) L8(-3.5,0.5) L9(-2.5,0.5) L10(-1.5,0.5) L11(-0.5,0.5) L12(0.5,0.5) L13(1.5,0.5) L14(2.5,0.5) L15(3.5,0.5) L16(4.5,0.5) L17(5.5,0.5) L18(6.5,0.5) L19(7.5,0.5) L20(8.5,0.5) L21(9.5,0.5) L22(10.5,0.5) M1(-10.5,-0.5) M2(-9.5,-0.5) M3(-8.5,-0.5) M4(-7.5,-0.5) M5(-6.5,-0.5) M6(-5.5,-0.5) M7(-4.5,-0.5) M8(-3.5,-0.5) M9(-2.5,-0.5) M10(-1.5,-0.5) M11(-0.5,-0.5) M12(0.5,-0.5) M13(1.5,-0.5) M14(2.5,-0.5) M15(3.5,-0.5) M16(4.5,-0.5) M17(5.5,-0.5) M18(6.5,-0.5) M19(7.5,-0.5) M20(8.5,-0.5) M21(9.5,-0.5) M22(10.5,-0.5) N1(-10.5,-1.5) N2(-9.5,-1.5) N3(-8.5,-1.5) N4(-7.5,-1.5) N5(-6.5,-1.5) N6(-5.5,-1.5) N7(-4.5,-1.5) N8(-3.5,-1.5) N9(-2.5,-1.5) N10(-1.5,-1.5) N11(-0.5,-1.5) N12(0.5,-1.5) N13(1.5,-1.5) N14(2.5,-1.5) N15(3.5,-1.5) N16(4.5,-1.5) N17(5.5,-1.5) N18(6.5,-1.5) N19(7.5,-1.5) N20(8.5,-1.5) N21(9.5,-1.5) N22(10.5,-1.5) P1(-10.5,-2.5) P2(-9.5,-2.5) P3(-8.5,-2.5) P4(-7.5,-2.5) P5(-6.5,-2.5) P6(-5.5,-2.5) P7(-4.5,-2.5) P8(-3.5,-2.5) P9(-2.5,-2.5) P10(-1.5,-2.5) P11(-0.5,-2.5) P12(0.5,-2.5) P13(1.5,-2.5) P14(2.5,-2.5) P15(3.5,-2.5) P16(4.5,-2.5) P17(5.5,-2.5) P18(6.5,-2.5) P19(7.5,-2.5) P20(8.5,-2.5) P21(9.5,-2.5) P22(10.5,-2.5) R1(-10.5,-3.5) R2(-9.5,-3.5) R3(-8.5,-3.5) R4(-7.5,-3.5) R5(-6.5,-3.5) R6(-5.5,-3.5) R7(-4.5,-3.5) R8(-3.5,-3.5) R9(-2.5,-3.5) R10(-1.5,-3.5) R11(-0.5,-3.5) R12(0.5,-3.5) R13(1.5,-3.5) R14(2.5,-3.5) R15(3.5,-3.5) R16(4.5,-3.5) R17(5.5,-3.5) R18(6.5,-3.5) R19(7.5,-3.5) R20(8.5,-3.5) R21(9.5,-3.5) R22(10.5,-3.5) T1(-10.5,-4.5) T2(-9.5,-4.5) T3(-8.5,-4.5) T4(-7.5,-4.5) T5(-6.5,-4.5) T6(-5.5,-4.5) T7(-4.5,-4.5) T8(-3.5,-4.5) T9(-2.5,-4.5) T10(-1.5,-4.5) T11(-0.5,-4.5) T12(0.5,-4.5) T13(1.5,-4.5) T14(2.5,-4.5) T15(3.5,-4.5) T16(4.5,-4.5) T17(5.5,-4.5) T18(6.5,-4.5) T19(7.5,-4.5) T20(8.5,-4.5) T21(9.5,-4.5) T22(10.5,-4.5) U1(-10.5,-5.5) U2(-9.5,-5.5) U3(-8.5,-5.5) U4(-7.5,-5.5) U5(-6.5,-5.5) U6(-5.5,-5.5) U7(-4.5,-5.5) U8(-3.5,-5.5) U9(-2.5,-5.5) U10(-1.5,-5.5) U11(-0.5,-5.5) U12(0.5,-5.5) U13(1.5,-5.5) U14(2.5,-5.5) U15(3.5,-5.5) U16(4.5,-5.5) U17(5.5,-5.5) U18(6.5,-5.5) U19(7.5,-5.5) U20(8.5,-5.5) U21(9.5,-5.5) U22(10.5,-5.5) V1(-10.5,-6.5) V2(-9.5,-6.5) V3(-8.5,-6.5) V4(-7.5,-6.5) V5(-6.5,-6.5) V6(-5.5,-6.5) V7(-4.5,-6.5) V8(-3.5,-6.5) V9(-2.5,-6.5) V10(-1.5,-6.5) V11(-0.5,-6.5) V12(0.5,-6.5) V13(1.5,-6.5) V14(2.5,-6.5) V15(3.5,-6.5) V16(4.5,-6.5) V17(5.5,-6.5) V18(6.5,-6.5) V19(7.5,-6.5) V20(8.5,-6.5) V21(9.5,-6.5) V22(10.5,-6.5) W1(-10.5,-7.5) W2(-9.5,-7.5) W3(-8.5,-7.5) W4(-7.5,-7.5) W5(-6.5,-7.5) W6(-5.5,-7.5) W7(-4.5,-7.5) W8(-3.5,-7.5) W9(-2.5,-7.5) W10(-1.5,-7.5) W11(-0.5,-7.5) W12(0.5,-7.5) W13(1.5,-7.5) W14(2.5,-7.5) W15(3.5,-7.5) W16(4.5,-7.5) W17(5.5,-7.5) W18(6.5,-7.5) W19(7.5,-7.5) W20(8.5,-7.5) W21(9.5,-7.5) W22(10.5,-7.5) Y1(-10.5,-8.5) Y2(-9.5,-8.5) Y3(-8.5,-8.5) Y4(-7.5,-8.5) Y5(-6.5,-8.5) Y6(-5.5,-8.5) Y7(-4.5,-8.5) Y8(-3.5,-8.5) Y9(-2.5,-8.5) Y10(-1.5,-8.5) Y11(-0.5,-8.5) Y12(0.5,-8.5) Y13(1.5,-8.5) Y14(2.5,-8.5) Y15(3.5,-8.5) Y16(4.5,-8.5) Y17(5.5,-8.5) Y18(6.5,-8.5) Y19(7.5,-8.5) Y20(8.5,-8.5) Y21(9.5,-8.5) Y22(10.5,-8.5)
C0402
  rect 0.6x0.6 smd: 1(-0.45,0) 2(0.45,0)
C0603
  rect 0.9x1 smd: 1(-0.75,0) 2(0.75,0)
C3216POL
  rect 1.524x1.778 smd: 1(0,0) 2(2.8,0)
CON150_QTSDA
  round 1.6 hole 1.016: (-1.054,-56.861) (-1.054,1.622)
  rect 1.448x0.406 smd: 1(0,0) 2(-6.17,0) 3(0,-0.635) 4(-6.17,-0.635) 5(0,-1.27) 6(-6.17,-1.27) 7(0,-1.905) 8(-6.17,-1.905) 9(0,-2.54) 10(-6.17,-2.54) 11(0,-3.175) 12(-6.17,-3.175) 13(0,-3.81) 14(-6.17,-3.81) 15(0,-4.445) 16(-6.17,-4.445) 17(0,-5.08) 18(-6.17,-5.08) 19(0,-5.715) 20(-6.17,-5.715) 21(0,-6.35) 22(-6.17,-6.35) 23(0,-6.985) 24(-6.17,-6.985) 25(0,-7.62) 26(-6.17,-7.62) 27(0,-8.255) 28(-6.17,-8.255) 29(0,-8.89) 30(-6.17,-8.89) 31(0,-9.525) 32(-6.17,-9.525) 33(0,-10.16) 34(-6.17,-10.16) 35(0,-10.795) 36(-6.17,-10.795) 37(0,-11.43) 38(-6.17,-11.43) 39(0,-12.065) 40(-6.17,-12.065) 41(0,-12.7) 42(-6.17,-12.7) 43(0,-13.335) 44(-6.17,-13.335) 45(0,-13.97) 46(-6.17,-13.97) 47(0,-14.605) 48(-6.17,-14.605) 49(0,-15.24) 50(-6.17,-15.24) 51(0,-20) 52(-6.17,-20) 53(0,-20.635) 54(-6.17,-20.635) 55(0,-21.27) 56(-6.17,-21.27) 57(0,-21.905) 58(-6.17,-21.905) 59(0,-22.54) 60(-6.17,-22.54) 61(0,-23.175) 62(-6.17,-23.175) 63(0,-23.81) 64(-6.17,-23.81) 65(0,-24.445) 66(-6.17,-24.445) 67(0,-25.08) 68(-6.17,-25.08) 69(0,-25.715) 70(-6.17,-25.715) 71(0,-26.35) 72(-6.17,-26.35) 73(0,-26.985) 74(-6.17,-26.985) 75(0,-27.62) 76(-6.17,-27.62) 77(0,-28.255) 78(-6.17,-28.255) 79(0,-28.89) 80(-6.17,-28.89) 81(0,-29.525) 82(-6.17,-29.525) 83(0,-30.16) 84(-6.17,-30.16) 85(0,-30.795) 86(-6.17,-30.795) 87(0,-31.43) 88(-6.17,-31.43) 89(0,-32.065) 90(-6.17,-32.065) 91(0,-32.7) 92(-6.17,-32.7) 93(0,-33.335) 94(-6.17,-33.335) 95(0,-33.97) 96(-6.17,-33.97) 97(0,-34.605) 98(-6.17,-34.605) 99(0,-35.24) 100(-6.17,-35.24) 101(0,-40) 102(-6.17,-40) 103(0,-40.635) 104(-6.17,-40.635) 105(0,-41.27) 106(-6.17,-41.27) 107(0,-41.905) 108(-6.17,-41.905) 109(0,-42.54) 110(-6.17,-42.54) 111(0,-43.175) 112(-6.17,-43.175) 113(0,-43.81) 114(-6.17,-43.81) 115(0,-44.445) 116(-6.17,-44.445) 117(0,-45.08) 118(-6.17,-45.08) 119(0,-45.715) 120(-6.17,-45.715) 121(0,-46.35) 122(-6.17,-46.35) 123(0,-46.985) 124(-6.17,-46.985) 125(0,-47.62) 126(-6.17,-47.62) 127(0,-48.255) 128(-6.17,-48.255) 129(0,-48.89) 130(-6.17,-48.89) 131(0,-49.525) 132(-6.17,-49.525) 133(0,-50.16) 134(-6.17,-50.16) 135(0,-50.795) 136(-6.17,-50.795) 137(0,-51.43) 138(-6.17,-51.43) 139(0,-52.065) 140(-6.17,-52.065) 141(0,-52.7) 142(-6.17,-52.7) 143(0,-53.335) 144(-6.17,-53.335) 145(0,-53.97) 146(-6.17,-53.97) 147(0,-54.605) 148(-6.17,-54.605) 149(0,-55.24) 150(-6.17,-55.24)
  rect 0.635x2.54 smd: 151(-3.086,0.826) 154(-3.086,-16.066) 155(-3.086,-19.174) 158(-3.086,-36.066) 159(-3.086,-39.174) 162(-3.086,-56.066)
  rect 0.635x4.699 smd: 152(-3.086,-4.445) 153(-3.086,-10.795) 156(-3.086,-24.445) 157(-3.086,-30.795) 160(-3.086,-44.445) 161(-3.086,-50.795)
CONHE13D3X1M
  round 1.524 hole 0.914: 1(0,0) 2(2.54,0) 3(5.08,0)
HARTING_0903196X921
  round 5 hole 2.8: 1(2.54,5.08) 2(2.54,-83.82)
  round 1.7 hole 1: A1(0,0) A2(0,-2.54) A3(0,-5.08) A4(0,-7.62) A5(0,-10.16) A6(0,-12.7) A7(0,-15.24) A8(0,-17.78) A9(0,-20.32) A10(0,-22.86) A11(0,-25.4) A12(0,-27.94) A13(0,-30.48) A14(0,-33.02) A15(0,-35.56) A16(0,-38.1) A17(0,-40.64) A18(0,-43.18) A19(0,-45.72) A20(0,-48.26) A21(0,-50.8) A22(0,-53.34) A23(0,-55.88) A24(0,-58.42) A25(0,-60.96) A26(0,-63.5) A27(0,-66.04) A28(0,-68.58) A29(0,-71.12) A30(0,-73.66) A31(0,-76.2) A32(0,-78.74) B1(-2.54,0) B2(-2.54,-2.54) B3(-2.54,-5.08) B4(-2.54,-7.62) B5(-2.54,-10.16) B6(-2.54,-12.7) B7(-2.54,-15.24) B8(-2.54,-17.78) B9(-2.54,-20.32) B10(-2.54,-22.86) B11(-2.54,-25.4) B12(-2.54,-27.94) B13(-2.54,-30.48) B14(-2.54,-33.02) B15(-2.54,-35.56) B16(-2.54,-38.1) B17(-2.54,-40.64) B18(-2.54,-43.18) B19(-2.54,-45.72) B20(-2.54,-48.26) B21(-2.54,-50.8) B22(-2.54,-53.34) B23(-2.54,-55.88) B24(-2.54,-58.42) B25(-2.54,-60.96) B26(-2.54,-63.5) B27(-2.54,-66.04) B28(-2.54,-68.58) B29(-2.54,-71.12) B30(-2.54,-73.66) B31(-2.54,-76.2) B32(-2.54,-78.74) C1(-5.08,0) C2(-5.08,-2.54) C3(-5.08,-5.08) C4(-5.08,-7.62) C5(-5.08,-10.16) C6(-5.08,-12.7) C7(-5.08,-15.24) C8(-5.08,-17.78) C9(-5.08,-20.32) C10(-5.08,-22.86) C11(-5.08,-25.4) C12(-5.08,-27.94) C13(-5.08,-30.48) C14(-5.08,-33.02) C15(-5.08,-35.56) C16(-5.08,-38.1) C17(-5.08,-40.64) C18(-5.08,-43.18) C19(-5.08,-45.72) C20(-5.08,-48.26) C21(-5.08,-50.8) C22(-5.08,-53.34) C23(-5.08,-55.88) C24(-5.08,-58.42) C25(-5.08,-60.96) C26(-5.08,-63.5) C27(-5.08,-66.04) C28(-5.08,-68.58) C29(-5.08,-71.12) C30(-5.08,-73.66) C31(-5.08,-76.2) C32(-5.08,-78.74)
HARTING_09732966801
  round 5 hole 2.8: 1(2.54,5.08) 2(2.54,-83.82)
  round 1.7 hole 1: A1(0,0) A2(0,-2.54) A3(0,-5.08) A4(0,-7.62) A5(0,-10.16) A6(0,-12.7) A7(0,-15.24) A8(0,-17.78) A9(0,-20.32) A10(0,-22.86) A11(0,-25.4) A12(0,-27.94) A13(0,-30.48) A14(0,-33.02) A15(0,-35.56) A16(0,-38.1) A17(0,-40.64) A18(0,-43.18) A19(0,-45.72) A20(0,-48.26) A21(0,-50.8) A22(0,-53.34) A23(0,-55.88) A24(0,-58.42) A25(0,-60.96) A26(0,-63.5) A27(0,-66.04) A28(0,-68.58) A29(0,-71.12) A30(0,-73.66) A31(0,-76.2) A32(0,-78.74) B1(-2.54,0) B2(-2.54,-2.54) B3(-2.54,-5.08) B4(-2.54,-7.62) B5(-2.54,-10.16) B6(-2.54,-12.7) B7(-2.54,-15.24) B8(-2.54,-17.78) B9(-2.54,-20.32) B10(-2.54,-22.86) B11(-2.54,-25.4) B12(-2.54,-27.94) B13(-2.54,-30.48) B14(-2.54,-33.02) B15(-2.54,-35.56) B16(-2.54,-38.1) B17(-2.54,-40.64) B18(-2.54,-43.18) B19(-2.54,-45.72) B20(-2.54,-48.26) B21(-2.54,-50.8) B22(-2.54,-53.34) B23(-2.54,-55.88) B24(-2.54,-58.42) B25(-2.54,-60.96) B26(-2.54,-63.5) B27(-2.54,-66.04) B28(-2.54,-68.58) B29(-2.54,-71.12) B30(-2.54,-73.66) B31(-2.54,-76.2) B32(-2.54,-78.74) C1(-5.08,0) C2(-5.08,-2.54) C3(-5.08,-5.08) C4(-5.08,-7.62) C5(-5.08,-10.16) C6(-5.08,-12.7) C7(-5.08,-15.24) C8(-5.08,-17.78) C9(-5.08,-20.32) C10(-5.08,-22.86) C11(-5.08,-25.4) C12(-5.08,-27.94) C13(-5.08,-30.48) C14(-5.08,-33.02) C15(-5.08,-35.56) C16(-5.08,-38.1) C17(-5.08,-40.64) C18(-5.08,-43.18) C19(-5.08,-45.72) C20(-5.08,-48.26) C21(-5.08,-50.8) C22(-5.08,-53.34) C23(-5.08,-55.88) C24(-5.08,-58.42) C25(-5.08,-60.96) C26(-5.08,-63.5) C27(-5.08,-66.04) C28(-5.08,-68.58) C29(-5.08,-71.12) C30(-5.08,-73.66) C31(-5.08,-76.2) C32(-5.08,-78.74)
INDC2012X90N
  rect 1.1x1.45 smd: 1(-0.9,0) 2(0.9,0)
LGA133S127P12X12_05-08-1766
  rect 0.65x0.65 smd: A1(-6.985,6.985) A2(-5.715,6.985) A3(-4.445,6.985) A4(-3.175,6.985) A5(-1.905,6.985) A6(-0.635,6.985) A7(0.635,6.985) A8(1.905,6.985) A9(3.175,6.985) A10(4.445,6.985) A11(5.715,6.985) A12(6.985,6.985) B1(-6.985,5.715) B2(-5.715,5.715) B3(-4.445,5.715) B4(-3.175,5.715) B5(-1.905,5.715) B6(-0.635,5.715) B7(0.635,5.715) B9(3.175,5.715) B11(5.715,5.715) B12(6.985,5.715) C1(-6.985,4.445) C2(-5.715,4.445) C3(-4.445,4.445) C4(-3.175,4.445) C5(-1.905,4.445) C6(-0.635,4.445) C7(0.635,4.445) C10(4.445,4.445) C11(5.715,4.445) C12(6.985,4.445) D1(-6.985,3.175) D2(-5.715,3.175) D3(-4.445,3.175) D4(-3.175,3.175) D5(-1.905,3.175) D6(-0.635,3.175) D9(3.175,3.175) D11(5.715,3.175) D12(6.985,3.175) E1(-6.985,1.905) E2(-5.715,1.905) E3(-4.445,1.905) E4(-3.175,1.905) E5(-1.905,1.905) E6(-0.635,1.905) E7(0.635,1.905) E8(1.905,1.905) E11(5.715,1.905) E12(6.985,1.905) F1(-6.985,0.635) F2(-5.715,0.635) F3(-4.445,0.635) F4(-3.175,0.635) F5(-1.905,0.635) F6(-0.635,0.635) F7(0.635,0.635) F8(1.905,0.635) F9(3.175,0.635) F12(6.985,0.635) G1(-6.985,-0.635) G2(-5.715,-0.635) G3(-4.445,-0.635) G4(-3.175,-0.635) G5(-1.905,-0.635) G6(-0.635,-0.635) G7(0.635,-0.635) G8(1.905,-0.635) G9(3.175,-0.635) G10(4.445,-0.635) G11(5.715,-0.635) G12(6.985,-0.635) H1(-6.985,-1.905) H2(-5.715,-1.905) H3(-4.445,-1.905) H4(-3.175,-1.905) H5(-1.905,-1.905) H6(-0.635,-1.905) H7(0.635,-1.905) H8(1.905,-1.905) H9(3.175,-1.905) H10(4.445,-1.905) H11(5.715,-1.905) H12(6.985,-1.905) J1(-6.985,-3.175) J2(-5.715,-3.175) J3(-4.445,-3.175) J4(-3.175,-3.175) J5(-1.905,-3.175) J6(-0.635,-3.175) J7(0.635,-3.175) J8(1.905,-3.175) J9(3.175,-3.175) J10(4.445,-3.175) J11(5.715,-3.175) J12(6.985,-3.175) K1(-6.985,-4.445) K2(-5.715,-4.445) K3(-4.445,-4.445) K4(-3.175,-4.445) K5(-1.905,-4.445) K6(-0.635,-4.445) K7(0.635,-4.445) K8(1.905,-4.445) K9(3.175,-4.445) K10(4.445,-4.445) K11(5.715,-4.445) K12(6.985,-4.445) L1(-6.985,-5.715) L2(-5.715,-5.715) L3(-4.445,-5.715) L4(-3.175,-5.715) L5(-1.905,-5.715) L6(-0.635,-5.715) L7(0.635,-5.715) L8(1.905,-5.715) L9(3.175,-5.715) L10(4.445,-5.715) L11(5.715,-5.715) L12(6.985,-5.715) M1(-6.985,-6.985) M2(-5.715,-6.985) M3(-4.445,-6.985) M4(-3.175,-6.985) M5(-1.905,-6.985) M6(-0.635,-6.985) M7(0.635,-6.985) M8(1.905,-6.985) M9(3.175,-6.985) M10(4.445,-6.985) M11(5.715,-6.985) M12(6.985,-6.985)
MOLEX_47082-001
  round 1 hole 1.4 unplated: (-7.2,-1.95)
  round 1 hole 1.7 unplated: (7.2,-2.85)
  rect 0.6x1.7 smd: 1(-3.81,0) 2(-2.54,0) 3(-1.27,0) 4(0,0) 5(1.27,0) 6(2.54,0) 7(3.81,0)
  round 2.4 hole 1.7: 8(-9.2,0.5) 9(9.2,0.5) 10(-9.2,-8.45) 11(9.2,-8.45)
MURATA_BNX02
  rect 2.5x2.5 smd: 1(-6.2,2.1) 2(6.2,2.1) 3(-6.2,-2.2) 4(6.2,-2.2)
  rect 3.4x1.4 smd: 5(3.25,4.5)
  rect 7.9x1.4 smd: 6(1,-4.5)
OSC_4PIN_53S
  rect 1x1.2 smd: 1(-1.15,1.85) 2(-1.15,-1.85) 3(1.15,-1.85) 4(1.15,1.85)
OSC_SILABS_SI570
  rect 1.7x2.15 smd: 1(-2.54,-2.1) 2(0,-2.1) 3(2.54,-2.1) 4(2.54,2.1) 5(0,2.1) 6(-2.54,2.1)
  rect 1.55x1.3 smd: 7(2.852,0) 8(-2.853,0)
PQFP240_050
  rect 2.413x0.254 smd: 1(0,0) 2(0,-0.5) 3(0,-1) 4(0,-1.5) 5(0,-2) 6(0,-2.5) 7(0,-3) 8(0,-3.5) 9(0,-4) 10(0,-4.5) 11(0,-5) 12(0,-5.5) 13(0,-6) 14(0,-6.5) 15(0,-7) 16(0,-7.5) 17(0,-8) 18(0,-8.5) 19(0,-9) 20(0,-9.5) 21(0,-10) 22(0,-10.5) 23(0,-11) 24(0,-11.5) 25(0,-12) 26(0,-12.5) 27(0,-13) 28(0,-13.5) 29(0,-14) 30(0,-14.5) 31(0,-15) 32(0,-15.5) 33(0,-16) 34(0,-16.5) 35(0,-17) 36(0,-17.5) 37(0,-18) 38(0,-18.5) 39(0,-19) 40(0,-19.5) 41(0,-20) 42(0,-20.5) 43(0,-21) 44(0,-21.5) 45(0,-22) 46(0,-22.5) 47(0,-23) 48(0,-23.5) 49(0,-24) 50(0,-24.5) 51(0,-25) 52(0,-25.5) 53(0,-26) 54(0,-26.5) 55(0,-27) 56(0,-27.5) 57(0,-28) 58(0,-28.5) 59(0,-29) 60(0,-29.5) 121(33.987,-29.5) 122(33.987,-29) 123(33.987,-28.5) 124(33.987,-28) 125(33.987,-27.5) 126(33.987,-27) 127(33.987,-26.5) 128(33.987,-26) 129(33.987,-25.5) 130(33.987,-25) 131(33.987,-24.5) 132(33.987,-24) 133(33.987,-23.5) 134(33.987,-23) 135(33.987,-22.5) 136(33.987,-22) 137(33.987,-21.5) 138(33.987,-21) 139(33.987,-20.5) 140(33.987,-20) 141(33.987,-19.5) 142(33.987,-19) 143(33.987,-18.5) 144(33.987,-18) 145(33.987,-17.5) 146(33.987,-17) 147(33.987,-16.5) 148(33.987,-16) 149(33.987,-15.5) 150(33.987,-15) 151(33.987,-14.5) 152(33.987,-14) 153(33.987,-13.5) 154(33.987,-13) 155(33.987,-12.5) 156(33.987,-12) 157(33.987,-11.5) 158(33.987,-11) 159(33.987,-10.5) 160(33.987,-10) 161(33.987,-9.5) 162(33.987,-9) 163(33.987,-8.5) 164(33.987,-8) 165(33.987,-7.5) 166(33.987,-7) 167(33.987,-6.5) 168(33.987,-6) 169(33.987,-5.5) 170(33.987,-5) 171(33.987,-4.5) 172(33.987,-4) 173(33.987,-3.5) 174(33.987,-3) 175(33.987,-2.5) 176(33.987,-2) 177(33.987,-1.5) 178(33.987,-1) 179(33.987,-0.5) 180(33.987,0)
  rect 0.254x2.413 smd: 61(2.244,-31.744) 62(2.744,-31.744) 63(3.244,-31.744) 64(3.744,-31.744) 65(4.244,-31.744) 66(4.744,-31.744) 67(5.244,-31.744) 68(5.744,-31.744) 69(6.244,-31.744) 70(6.744,-31.744) 71(7.244,-31.744) 72(7.744,-31.744) 73(8.243,-31.744) 74(8.743,-31.744) 75(9.243,-31.744) 76(9.743,-31.744) 77(10.243,-31.744) 78(10.743,-31.744) 79(11.243,-31.744) 80(11.743,-31.744) 81(12.243,-31.744) 82(12.743,-31.744) 83(13.243,-31.744) 84(13.743,-31.744) 85(14.243,-31.744) 86(14.743,-31.744) 87(15.243,-31.744) 88(15.743,-31.744) 89(16.244,-31.744) 90(16.744,-31.744) 91(17.244,-31.744) 92(17.744,-31.744) 93(18.244,-31.744) 94(18.744,-31.744) 95(19.244,-31.744) 96(19.744,-31.744) 97(20.244,-31.744) 98(20.744,-31.744) 99(21.244,-31.744) 100(21.744,-31.744) 101(22.244,-31.744) 102(22.744,-31.744) 103(23.244,-31.744) 104(23.744,-31.744) 105(24.244,-31.744) 106(24.744,-31.744) 107(25.244,-31.744) 108(25.744,-31.744) 109(26.244,-31.744) 110(26.744,-31.744) 111(27.244,-31.744) 112(27.744,-31.744) 113(28.244,-31.744) 114(28.744,-31.744) 115(29.244,-31.744) 116(29.744,-31.744) 117(30.244,-31.744) 118(30.744,-31.744) 119(31.244,-31.744) 120(31.744,-31.744) 181(31.744,2.244) 182(31.244,2.244) 183(30.744,2.244) 184(30.244,2.244) 185(29.744,2.244) 186(29.244,2.244) 187(28.744,2.244) 188(28.244,2.244) 189(27.744,2.244) 190(27.244,2.244) 191(26.744,2.244) 192(26.244,2.244) 193(25.744,2.244) 194(25.244,2.244) 195(24.744,2.244) 196(24.244,2.244) 197(23.744,2.244) 198(23.244,2.244) 199(22.744,2.244) 200(22.244,2.244) 201(21.744,2.244) 202(21.244,2.244) 203(20.744,2.244) 204(20.244,2.244) 205(19.744,2.244) 206(19.244,2.244) 207(18.744,2.244) 208(18.244,2.244) 209(17.744,2.244) 210(17.244,2.244) 211(16.744,2.244) 212(16.244,2.244) 213(15.743,2.244) 214(15.243,2.244) 215(14.743,2.244) 216(14.243,2.244) 217(13.743,2.244) 218(13.243,2.244) 219(12.743,2.244) 220(12.243,2.244) 221(11.743,2.244) 222(11.243,2.244) 223(10.743,2.244) 224(10.243,2.244) 225(9.743,2.244) 226(9.243,2.244) 227(8.743,2.244) 228(8.243,2.244) 229(7.744,2.244) 230(7.244,2.244) 231(6.744,2.244) 232(6.244,2.244) 233(5.744,2.244) 234(5.244,2.244) 235(4.744,2.244) 236(4.244,2.244) 237(3.744,2.244) 238(3.244,2.244) 239(2.744,2.244) 240(2.244,2.244)
QFN50P400X500X80-29N-R375X275
  rect 0.8x0.3 smd: 1(-2,1.75) 2(-2,1.25) 3(-2,0.75) 4(-2,0.25) 5(-2,-0.25) 6(-2,-0.75) 7(-2,-1.25) 8(-2,-1.75) 15(2,-1.75) 16(2,-1.25) 17(2,-0.75) 18(2,-0.25) 19(2,0.25) 20(2,0.75) 21(2,1.25) 22(2,1.75)
  rect 0.3x0.8 smd: 9(-1.25,-2.5) 10(-0.75,-2.5) 11(-0.25,-2.5) 12(0.25,-2.5) 13(0.75,-2.5) 14(1.25,-2.5) 23(1.25,2.5) 24(0.75,2.5) 25(0.25,2.5) 26(-0.25,2.5) 27(-0.75,2.5) 28(-1.25,2.5)
  rect 2.75x3.75 smd: 29(0,0)
QFN50P500X500X100-33N-S355
  rect 0.85x0.3 smd: 1(-2.5,1.75) 2(-2.5,1.25) 3(-2.5,0.75) 4(-2.5,0.25) 5(-2.5,-0.25) 6(-2.5,-0.75) 7(-2.5,-1.25) 8(-2.5,-1.75) 17(2.5,-1.75) 18(2.5,-1.25) 19(2.5,-0.75) 20(2.5,-0.25) 21(2.5,0.25) 22(2.5,0.75) 23(2.5,1.25) 24(2.5,1.75)
  rect 0.3x0.85 smd: 9(-1.75,-2.5) 10(-1.25,-2.5) 11(-0.75,-2.5) 12(-0.25,-2.5) 13(0.25,-2.5) 14(0.75,-2.5) 15(1.25,-2.5) 16(1.75,-2.5) 25(1.75,2.5) 26(1.25,2.5) 27(0.75,2.5) 28(0.25,2.5) 29(-0.25,2.5) 30(-0.75,2.5) 31(-1.25,2.5) 32(-1.75,2.5)
  rect 3.55x3.55 smd: 33(0,0)
SAMTEC_SSW-103-01-G-D
  round 1.6 hole 0.9: 1(2.54,-1.27) 2(2.54,1.27) 3(0,-1.27) 4(0,1.27) 5(-2.54,-1.27) 6(-2.54,1.27)
SOD323_INV
  rect 0.9x0.5 smd: 1(1.3,0) 2(-1.3,0)
SOIC127P600X175-8N
  rect 1.6x0.6 smd: 1(-2.65,1.905) 2(-2.65,0.635) 3(-2.65,-0.635) 4(-2.65,-1.905) 5(2.65,-1.905) 6(2.65,-0.635) 7(2.65,0.635) 8(2.65,1.905)
SOIC127P1032X265-16N
  rect 2x0.6 smd: 1(-4.65,4.445) 2(-4.65,3.175) 3(-4.65,1.905) 4(-4.65,0.635) 5(-4.65,-0.635) 6(-4.65,-1.905) 7(-4.65,-3.175) 8(-4.65,-4.445) 9(4.65,-4.445) 10(4.65,-3.175) 11(4.65,-1.905) 12(4.65,-0.635) 13(4.65,0.635) 14(4.65,1.905) 15(4.65,3.175) 16(4.65,4.445)
SOP65P490X95-8N
  rect 1.45x0.45 smd: 1(-2.2,0.975) 2(-2.2,0.325) 3(-2.2,-0.325) 4(-2.2,-0.975) 5(2.2,-0.975) 6(2.2,-0.325) 7(2.2,0.325) 8(2.2,0.975)
SOP65P490X110-8N
  rect 1.45x0.45 smd: 1(-2.2,0.975) 2(-2.2,0.325) 3(-2.2,-0.325) 4(-2.2,-0.975) 5(2.2,-0.975) 6(2.2,-0.325) 7(2.2,0.325) 8(2.2,0.975)
SOT23
  rect 0.762x0.635 smd: 1(-0.889,0.94) 2(-0.889,-0.965) 3(0.889,0)
SOT23-5
  rect 0.635x0.508 smd: 1(-1.245,0.94) 2(-1.245,0) 3(-1.245,-0.94) 4(1.245,-0.94) 5(1.245,0.94)
TO254P1435X460-4N
  rect 2.8x1.05 smd: 1(-6.2,2.54) 2(-6.2,0) 3(-6.2,-2.54)
  rect 7.5x10.5 smd: 4(3.85,0)
TYCO_1367073
  round 1 hole 1.55 unplated: (0,4.795) (0,-4.805)
  rect 2x0.5 smd: 1(-4.1,3.395) 2(-4.1,2.595) 3(-4.1,1.795) 4(-4.1,0.995) 5(-4.1,0.195) 6(-4.1,-0.605) 7(-4.1,-1.405) 8(-4.1,-2.205) 9(-4.1,-3.005) 10(-4.1,-3.805) 11(4.1,-3.405) 12(4.1,-2.605) 13(4.1,-1.805) 14(4.1,-1.005) 15(4.1,-0.205) 16(4.1,0.595) 17(4.1,1.395) 18(4.1,2.195) 19(4.1,2.995) 20(4.1,3.795)
unnamed
  round 1 hole 1.55 unplated: (0.9,-2.33) (0.9,-11.93)
  rect 2x0.5 smd: 1(-3.2,-3.73) 2(-3.2,-4.53) 3(-3.2,-5.33) 4(-3.2,-6.13) 5(-3.2,-6.93) 6(-3.2,-7.73) 7(-3.2,-8.53) 8(-3.2,-9.33) 9(-3.2,-10.13) 10(-3.2,-10.93) 11(5,-10.53) 12(5,-9.73) 13(5,-8.93) 14(5,-8.13) 15(5,-7.33) 16(5,-6.53) 17(5,-5.73) 18(5,-4.93) 19(5,-4.13) 20(5,-3.33)
  round 1.45 hole 0.95: 21(7.1,-11.925) 22(7.1,-7.125) 23(7.1,-2.325) 24(2.5,0) 26(-2.5,0) 27(-7.2,0) 34(-7.2,-14.25) 36(-2.5,-14.25) 37(2.5,-14.25)
  round 1.35 hole 0.85: 25(0,0)
  round 1.55 hole 1.05: 28(-10,0) 29(-20,0) 30(-30,0) 31(-30,-8.58) 32(-25,-14.25) 33(-15,-14.25) 35(-5,-14.25) 38(5,-14.25) 39(-10,-11.08) 40(-10,-5.68)
unnamed#2
  rect 1.778x1.778 hole 1.067: (-30,0) (-25,-14.25) (-20,0) (-15,-14.25) (-10,0) (-5,-14.25) (5,-14.25) 21(-10,-5.68) 22(-10,-11.08) 23(-30,-8.58)
  round 1.676 hole 0.965: (-7.2,0) (-7.2,-14.25) (-2.5,0) (-2.5,-14.25) (2.5,0) (2.5,-14.25) (7.1,-2.33) (7.1,-7.13) (7.1,-11.93)
  rect 1.575x1.575 hole 0.864: (0,0)
  round 2.337 hole 1.626: (0.9,-2.32) (0.9,-11.92)
  rect 2x0.5 smd: 1(-3.2,-3.72) 2(-3.2,-4.52) 3(-3.2,-5.32) 4(-3.2,-6.12) 5(-3.2,-6.92) 6(-3.2,-7.72) 7(-3.2,-8.52) 8(-3.2,-9.32) 9(-3.2,-10.12) 10(-3.2,-10.92) 11(5,-10.52) 12(5,-9.72) 13(5,-8.92) 14(5,-8.12) 15(5,-7.32) 16(5,-6.52) 17(5,-5.72) 18(5,-4.92) 19(5,-4.12) 20(5,-3.32)
unnamed#3
  round 1 hole 1.55 unplated: (12.375,4.795) (12.375,-4.805)
  rect 2x0.5 smd: 1(8.275,3.395) 2(8.275,2.595) 3(8.275,1.795) 4(8.275,0.995) 5(8.275,0.195) 6(8.275,-0.605) 7(8.275,-1.405) 8(8.275,-2.205) 9(8.275,-3.005) 10(8.275,-3.805) 11(16.475,-3.405) 12(16.475,-2.605) 13(16.475,-1.805) 14(16.475,-1.005) 15(16.475,-0.205) 16(16.475,0.595) 17(16.475,1.395) 18(16.475,2.195) 19(16.475,2.995) 20(16.475,3.795)
  round 1.45 hole 0.95: 21(18.575,-4.8) 22(18.575,0) 23(18.575,4.8) 24(13.975,7.125) 26(8.975,7.125) 27(4.275,7.125) 34(4.275,-7.125) 36(8.975,-7.125) 37(13.975,-7.125)
  round 1.35 hole 0.85: 25(11.475,7.125)
  round 1.55 hole 1.05: 28(1.475,7.125) 29(-8.525,7.125) 30(-18.525,7.125) 31(-18.525,-1.455) 32(-13.525,-7.125) 33(-3.525,-7.125) 35(6.475,-7.125) 38(16.475,-7.125) 39(1.475,-3.955) 40(1.475,1.445)

## Nets
AVDD: C29_1.2(B<0>) C54_1.2(B<0>) J1.147(A<146>) J1.148(A<147>) J1.149(A<148>) J1.150(A<149>) J1_1.6(A<5>) R5_1.2(B<0>) R6_1.2(B<0>) R7_1.2(B<0>) R8_1.2(B<0>) R9_1.2(B<0>) R10_1.2(B<0>) R11_1.2(B<0>) R12_1.2(B<0>) R13_1.2(B<0>) R14_1.2(B<0>) R15_1.2(B<0>) R16_1.2(B<0>) R17_1.2(B<0>) R20_1.2(B<0>) R22_1.2(B<0>) R25_1.2(B<0>) R27_1.2(B<0>) R28_1.2(B<0>) R30_1.2(B<0>) R32_1.2(B<0>) R34_1.2(B<0>) R36_1.2(B<0>) R42_1.2(B<0>) R46_1.1(A<0>) R47_1.1(A<0>) REG2.2(VOUT) REG2.4(CASE) RG1_1.3(IN<1>) RG1_1.4(IN<2>) U2.5(VSPLUS)
DGND: IC4.D1(PGND<40>) IC4.D2(PGND<39>) IC4.D3(PGND<38>) IC4.D4(PGND<37>) IC4.D5(PGND<36>) IC4.D6(PGND<35>) IC4.D9(SGND<1>) IC4.E1(PGND<34>) IC4.E2(PGND<33>) IC4.E3(PGND<32>) IC4.E4(PGND<31>) IC4.E5(PGND<30>) IC4.E6(PGND<29>) IC4.E7(PGND<28>) IC4.E8(PGND<27>) IC4.F1(PGND<26>) IC4.F2(PGND<25>) IC4.F3(PGND<24>) IC4.F4(PGND<23>) IC4.F5(PGND<22>) IC4.F6(PGND<21>) IC4.F7(PGND<20>) IC4.F8(PGND<19>) IC4.F9(PGND<18>) IC4.G1(PGND<17>) IC4.G2(PGND<16>) IC4.G3(PGND<15>) IC4.G4(PGND<14>) IC4.G5(PGND<13>) IC4.G6(PGND<12>) IC4.G7(PGND<11>) IC4.G8(PGND<10>) IC4.G9(PGND<9>) IC4.G10(PGND<41>) IC4.G11(PGND<42>) IC4.H1(PGND<8>) IC4.H2(PGND<7>) IC4.H3(PGND<6>) IC4.H4(PGND<5>) IC4.H5(PGND<4>) IC4.H6(PGND<3>) IC4.H7(PGND<2>) IC4.H8(PGND<1>) IC4.H9(PGND<0>) IC4.H10(PGND<44>) IC4.H11(PGND<43>) IC4.H12(SGND<0>) IC4.M12(FCB) IC10.D1(PGND<40>) IC10.D2(PGND<39>) IC10.D3(PGND<38>) IC10.D4(PGND<37>) IC10.D5(PGND<36>) IC10.D6(PGND<35>) IC10.D9(SGND<1>) IC10.E1(PGND<34>) IC10.E2(PGND<33>) IC10.E3(PGND<32>) IC10.E4(PGND<31>) IC10.E5(PGND<30>) IC10.E6(PGND<29>) IC10.E7(PGND<28>) IC10.E8(PGND<27>) IC10.F1(PGND<26>) IC10.F2(PGND<25>) IC10.F3(PGND<24>) IC10.F4(PGND<23>) IC10.F5(PGND<22>) IC10.F6(PGND<21>) IC10.F7(PGND<20>) IC10.F8(PGND<19>) IC10.F9(PGND<18>) IC10.G1(PGND<17>) IC10.G2(PGND<16>) IC10.G3(PGND<15>) IC10.G4(PGND<14>) IC10.G5(PGND<13>) IC10.G6(PGND<12>) IC10.G7(PGND<11>) IC10.G8(PGND<10>) IC10.G9(PGND<9>) IC10.G10(PGND<41>) IC10.G11(PGND<42>) IC10.H1(PGND<8>) IC10.H2(PGND<7>) IC10.H3(PGND<6>) IC10.H4(PGND<5>) IC10.H5(PGND<4>) IC10.H6(PGND<3>) IC10.H7(PGND<2>) IC10.H8(PGND<1>) IC10.H9(PGND<0>) IC10.H10(PGND<44>) IC10.H11(PGND<43>) IC10.H12(SGND<0>) IC10.M12(FCB) J2.A31(A<30>) J2.B31(B<30>) J2.C31(C<30>) J3.A2(A<1>) J3.B2(B<1>) J3.C2(C<1>) LC2.3(PSG)
GND_SIGNAL: C1_1.2(B<0>) C2_1.1(A<0>) C3_1.1(A<0>) C4_1.1(A<0>) C5_1.1(A<0>) C6_1.1(A<0>) C7_1.1(A<0>) C8_1.1(A<0>) C9_1.1(A<0>) C10_1.1(A<0>) C11_1.1(A<0>) C12_1.1(A<0>) C13_1.1(A<0>) C14_1.1(A<0>) C15_1.1(A<0>) C16_1.1(A<0>) C17_1.1(A<0>) C18_1.1(A<0>) C19_1.1(A<0>) C20_1.1(A<0>) C21_1.1(A<0>) C22_1.1(A<0>) C23_1.1(A<0>) C24_1.1(A<0>) C25_1.1(A<0>) C26_1.1(A<0>) C27_1.1(A<0>) C28_1.1(A<0>) C30_1.1(A<0>) C31_1.1(A<0>) C32_1.1(A<0>) C33_1.1(A<0>) C34_1.1(A<0>) C35_1.1(A<0>) C36_1.1(A<0>) C37_1.1(A<0>) C38_1.1(A<0>) C39_1.1(A<0>) C40_1.1(A<0>) C41_1.1(A<0>) C42_1.1(A<0>) C43_1.1(A<0>) C44_1.1(A<0>) C45_1.1(A<0>) C46_1.1(A<0>) C47_1.1(A<0>) C48_1.2(B<0>) C50_1.1(A<0>) C51_1.1(A<0>) C52_1.1(A<0>) C53_1.1(A<0>) C54_1.1(A<0>) D1_1.1(K<0>) IC1.8 IC2.1 IC3.1 IC5.1 IC6.1 IC7.1 IC8.5 IC9.8 IC11.22(GND<0>) IC11.33(GND<1>) IC12.10 IC13.4(GND) J1.1(A<0>) J1.4(A<3>) J1.5(A<4>) J1.8(A<7>) J1.9(A<8>) J1.12(A<11>) J1.13(A<12>) J1.16(A<15>) J1.17(A<16>) J1.20(A<19>) J1.21(A<20>) J1.24(A<23>) J1.25(A<24>) J1.28(A<27>) J1.29(A<28>) J1.32(A<31>) J1.33(A<32>) J1.36(A<35>) J1.37(A<36>) J1.40(A<39>) J1.41(A<40>) J1.44(A<43>) J1.45(A<44>) J1.48(A<47>) J1.49(A<48>) J1.52(A<51>) J1.53(A<52>) J1.56(A<55>) J1.57(A<56>) J1.60(A<59>) J1.61(A<60>) J1.64(A<63>) J1.65(A<64>) J1.68(A<67>) J1.69(A<68>) J1.72(A<71>) J1.73(A<72>) J1.76(A<75>) J1.77(A<76>) J1.80(A<79>) J1.81(A<80>) J1.84(A<83>) J1.85(A<84>) J1.88(A<87>) J1.89(A<88>) J1.92(A<91>) J1.93(A<92>) J1.96(A<95>) J1.97(A<96>) J1.100(A<99>) J1.101(A<100>) J1.104(A<103>) J1.105(A<104>) J1.108(A<107>) J1.109(A<108>) J1.112(A<111>) J1.113(A<112>) J1.116(A<115>) J1.117(A<116>) J1.120(A<119>) J1.121(A<120>) J1.124(A<123>) J1.125(A<124>) J1.128(A<127>) J1.129(A<128>) J1.132(A<131>) J1.133(A<132>) J1.136(A<135>) J1.137(A<136>) J1.140(A<139>) J1.141(A<140>) J1.144(A<143>) J1.145(A<144>) J1.146(A<145>) J1.151 J1.152 J1.153 J1.154 J1.155 J1.156 J1.157 J1.158 J1.159 J1.160 J1.161 J1.162 J1_1.2(A<1>) J1_1.4(A<3>) J1_1.5(A<4>) J2.A3(A<2>) J2.A6(A<5>) J2.A9(A<8>) J2.A12(A<11>) J2.A15(A<14>) J2.A18(A<17>) J2.A21(A<20>) J2.A24(A<23>) J2.A27(A<26>) J2.A30(A<29>) J2.B1(B<0>) J2.B2(B<1>) J2.B3(B<2>) J2.B4(B<3>) J2.B5(B<4>) J2.B6(B<5>) J2.B7(B<6>) J2.B8(B<7>) J2.B9(B<8>) J2.B10(B<9>) J2.B11(B<10>) J2.B12(B<11>) J2.B13(B<12>) J2.B14(B<13>) J2.B15(B<14>) J2.B16(B<15>) J2.B17(B<16>) J2.B18(B<17>) J2.B19(B<18>) J2.B20(B<19>) J2.B21(B<20>) J2.B22(B<21>) J2.B23(B<22>) J2.B24(B<23>) J2.B25(B<24>) J2.B26(B<25>) J2.B29(B<28>) J2.B30(B<29>) J2.C3(C<2>) J2.C6(C<5>) J2.C9(C<8>) J2.C12(C<11>) J2.C15(C<14>) J2.C18(C<17>) J2.C21(C<20>) J2.C24(C<23>) J2.C27(C<26>) J2.C30(C<29>) J3.B3(B<2>) J3.B4(B<3>) J3.B7(B<6>) J3.B8(B<7>) J3.B9(B<8>) J3.B10(B<9>) J3.B11(B<10>) J3.B12(B<11>) J3.B13(B<12>) J3.B14(B<13>) J3.B15(B<14>) J3.B16(B<15>) J3.B17(B<16>) J3.B18(B<17>) J3.B19(B<18>) J3.B20(B<19>) J3.B21(B<20>) J3.B22(B<21>) J3.B23(B<22>) J3.B24(B<23>) J3.B25(B<24>) J3.B26(B<25>) J3.B27(B<26>) J3.B28(B<27>) J3.B29(B<28>) J3.B30(B<29>) J3.B31(B<30>) J3.B32(B<31>) J3.C3(C<2>) J3.C6(C<5>) J3.C9(C<8>) J3.C12(C<11>) J3.C15(C<14>) J3.C18(C<17>) J3.C21(C<20>) J3.C24(C<23>) J3.C27(C<26>) J3.C30(C<29>) J3_1.1(A<0>) J4.8 J4.9 J4.10 J4.11 J4_1.3(A<2>) J5.8 J5.9 J5.10 J5.11 J6.1(VEET1) J6.9(VEER/RS1) J6.10(VEER1) J6.11(VEER2) J6.14(VEER3) J6.17(VEET2) J6.20(VEET3) J7.1(VEET1) J7.9(VEER/RS1) J7.10(VEER1) J7.11(VEER2) J7.14(VEER3) J7.17(VEET2) J7.20(VEET3) LC2.4(CG<0>) LC2.5(CG<1>) LC2.6(CG<2>) LK30_1.1(A<0>) LK55_1.1(A<0>) QZ1.3 R21_1.1(A<0>) R23_1.1(A<0>) R26_1.1(A<0>) R29_1.1(A<0>) R31_1.1(A<0>) R33_1.1(A<0>) R35_1.1(A<0>) R37_1.1(A<0>) REG1.1(GND) RG1.4 RG1.9 RG1.10 RG1.11 RG1.12 RG1.13 RG1.14 RG1.20 RG1.25(VO2) RG1.26 RG1.29 RG1_1.1(GND) RG1_1.2(EN*) U1.2(GND) U1_1.30(GND_PA2) U1_1.63(GND_PA) U1_1.65(VSSA) U1_1.73(GND_NMOS) U1_1.77(GND_W) U1_1.85(GND_DAC) U1_1.92(E_FSU) U1_1.98(GND_WILK) U1_1.102(VSSA2) U1_1.103(VSSM) U1_1.109(GND_DISCRI) U1_1.111(VSSD) U1_1.112(GNDD) U1_1.150(VSSD2) U1_1.183(GNDD2) U1_1.189(VSSD3) U1_1.195(GND_DISCRI2) U1_1.197(VSSM2) U1_1.198(VSS) U1_1.202(GND_FSU) U1_1.206(GND_FSB1) U1_1.211(GND_FSB0) U1_1.217(GND_CAPA) U1_1.219(GND_SS) U1_1.227(GND_OTAG) U1_1.231(GND_NMOS2) U1_1.235(VSSI) U1_1.237(GND_PA3) U2.2(VSMIN) U3.A1(GND<0>) U3.A9(GND<1>) U3.A11(GND<2>) U3.A13(GND<3>) U3.A22(GND<4>) U3.AA5(GND<5>) U3.AA9(GND<6>) U3.AA13(GND<7>) U3.AA17(GND<8>) U3.AA22(SUSPEND) U3.AB1(GND<9>) U3.AB22(GND<10>) U3.B5(GND<11>) U3.B7(GND<12>) U3.B11(GND<13>) U3.B15(GND<14>) U3.B17(GND<15>) U3.C6(GND<16>) U3.C8(GND<17>) U3.C12(GND<18>) U3.C14(GND<19>) U3.C16(GND<20>) U3.D6(GND<21>) U3.D10(GND<22>) U3.D16(GND<23>) U3.E2(GND<24>) U3.E7(GND<25>) U3.E11(GND<26>) U3.E14(GND<27>) U3.E15(GND<28>) U3.E21(GND<29>) U3.F13(GND<30>) U3.G5(GND<31>) U3.G18(GND<32>) U3.H7(GND<33>) U3.J2(GND<34>) U3.J9(GND<35>) U3.J11(GND<36>) U3.J13(GND<37>) U3.J15(GND<38>) U3.J21(GND<39>) U3.K10(GND<40>) U3.K12(GND<41>) U3.K14(GND<42>) U3.L5(GND<43>) U3.L9(GND<44>) U3.L11(GND<45>) U3.L13(GND<46>) U3.L18(GND<47>) U3.M10(GND<48>) U3.M12(GND<49>) U3.M14(GND<50>) U3.N2(GND<51>) U3.N9(GND<52>) U3.N11(GND<53>) U3.N13(GND<54>) U3.N17(GND<55>) U3.N21(GND<56>) U3.P10(GND<57>) U3.P12(GND<58>) U3.P14(GND<59>) U3.R5(GND<60>) U3.R18(GND<61>) U3.U2(GND<62>) U3.U7(GND<63>) U3.U21(GND<64>) U3.V4(GND<65>) U3.V10(GND<66>) U3.V14(GND<67>) U3.W7(GND<68>) U3.W16(GND<69>) U3.W19(GND<70>) Z1.2(AN)
